# Altium PCB LightLinkV2.PcbDoc
Units mil, origin at the board's own origin, x right, y up, seen from the top; angles counter-clockwise.
Board outline 15795 x 10265 mil, 2 copper layers (Top Layer, Bottom Layer); 257 components, 206 nets, 785 pads, 0 vias.
Unrouted connection lines stored in the file: 530.
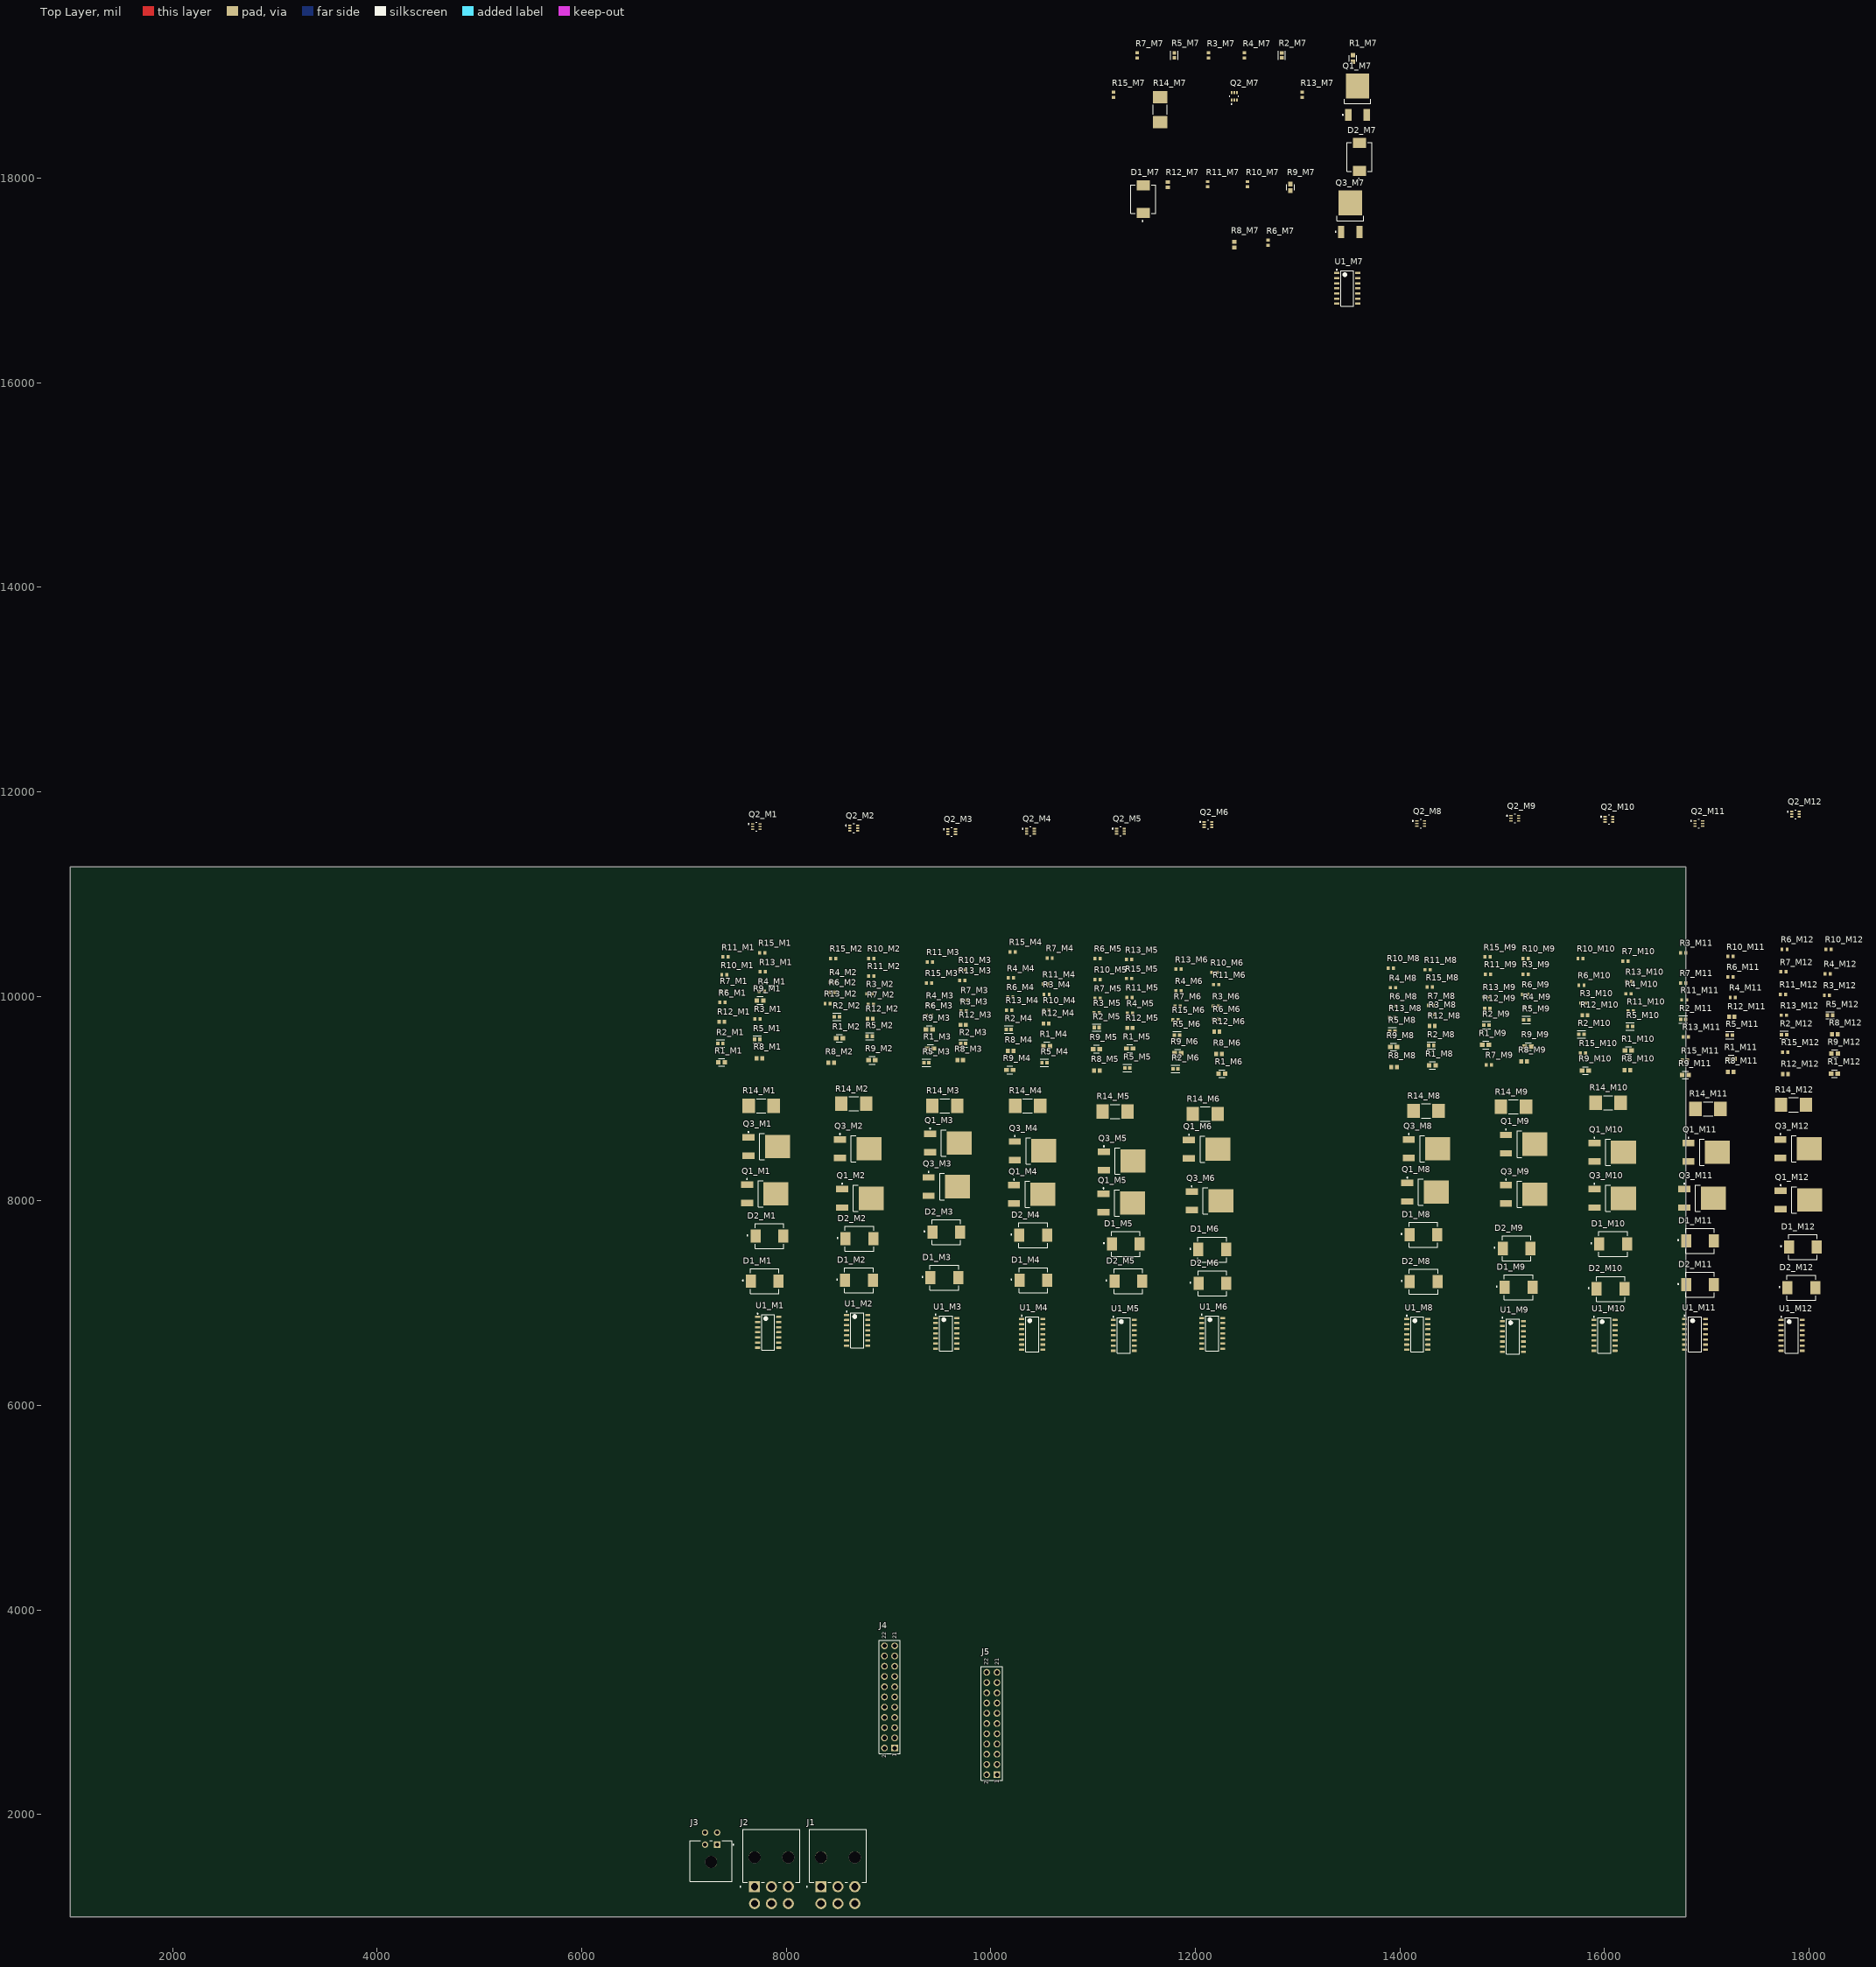
[diagram p0: Top Layer view]
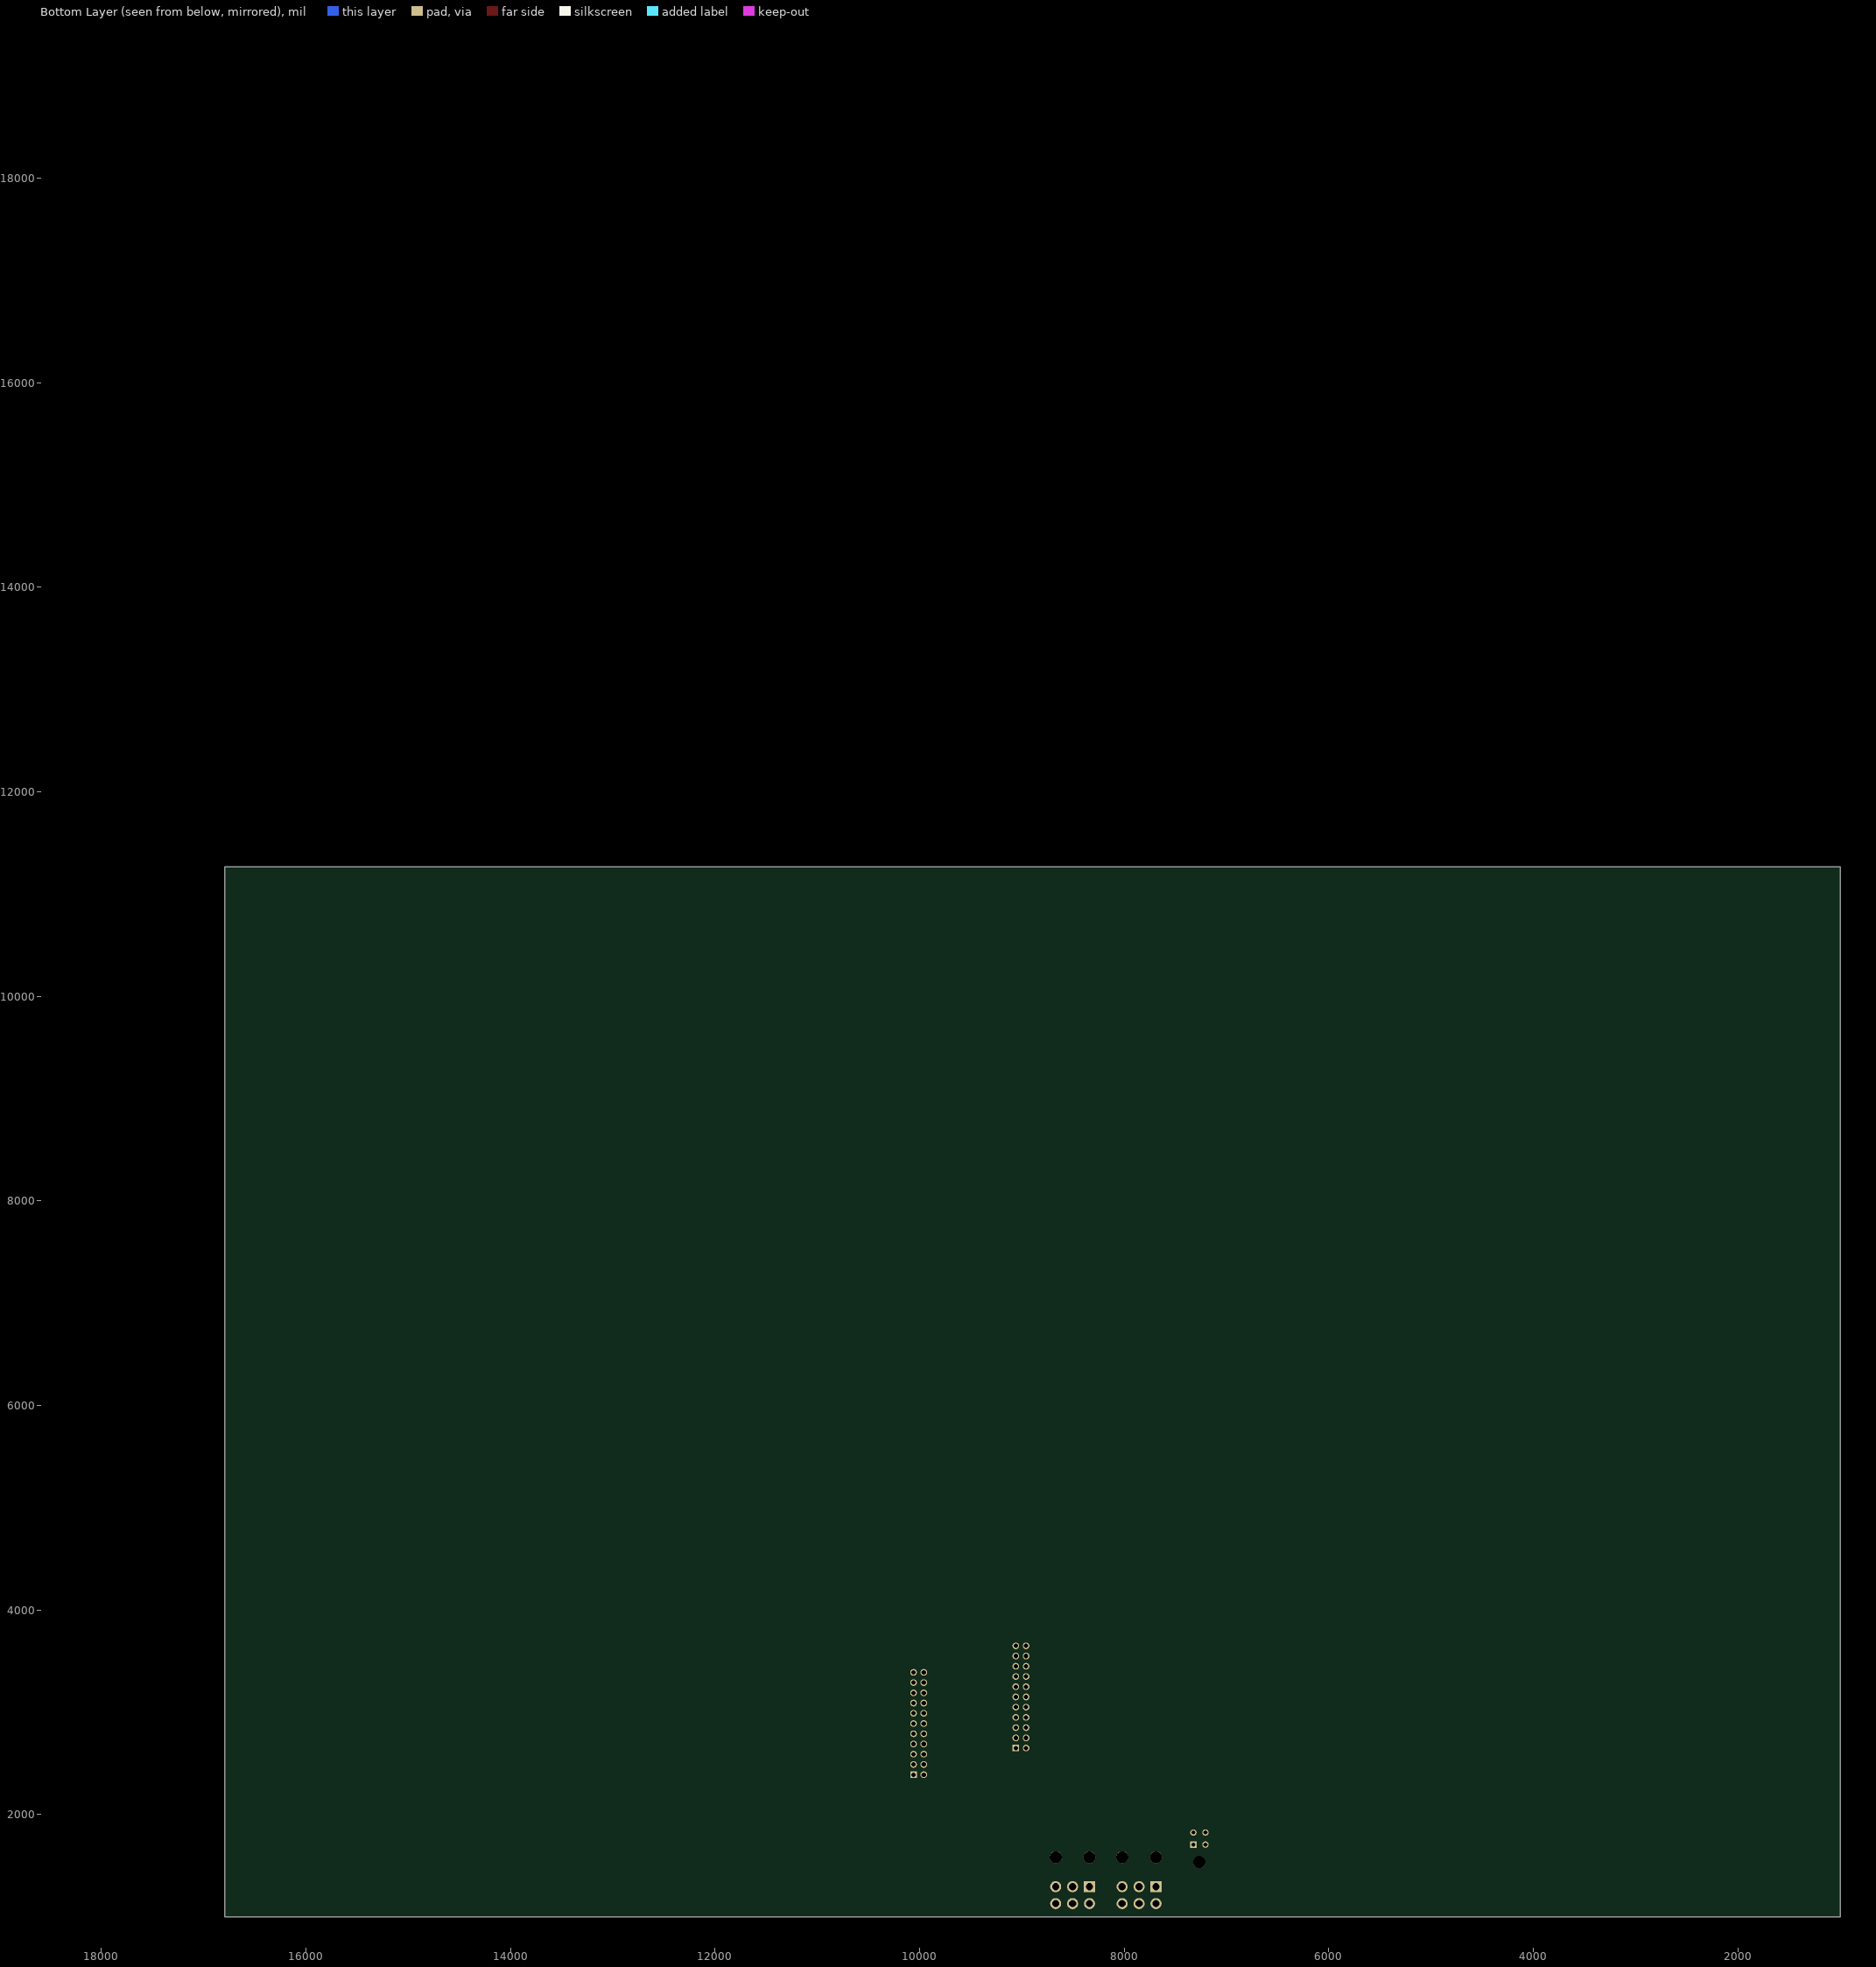
[diagram p1: Bottom Layer view, seen from below]

## Layer stack, top to bottom
Top Solder: solder mask 0.4, Solder Resist, Dk 3.5
Top Layer: signal copper 1.4
Dielectric 1: dielectric 12.6, FR-4, Dk 4.8
Bottom Layer: signal copper 1.4
Bottom Solder: solder mask 0.4, Solder Resist, Dk 3.5

## Board outline
1000,1000 16795,1000 16795,11265 1000,11265

## Design rules (kind name [scope] priority, off if disabled: settings)
Clearance [All] p1: gap=10 ignorepadtopadclearanceinfootprint=FALSE except(0: Arc-Hole Track-Hole SMDPad-Hole THPad-Hole Via-Hole Fill-Hole Poly-Hole Region-Hole Text-Hole)
PolygonConnect [All] p1: connectstyle=Relief reliefconductorwidth=10 reliefentries=4 polygonreliefangle="90 Angle" airgapwidth=10
RoutingVias [All] p1: holewidth=28 width=50 viastyle="Through Hole" minholewidth=28 minwidth=50 maxholewidth=28 maxwidth=50
SolderMaskExpansion [All] p1: expansion=4 istentingtop=FALSE
Width [All] p1: maxlimit=10 minlimit=10 preferedwidth=10
30 further rules are at their usual default settings.

## Classes and differential pairs
channel class MOSFET: M1 M2 M3 M4 M5 M6 M7 M8 M9 M10 M11 M12
component class M12: D1_M12 D2_M12 Q1_M12 Q2_M12 Q3_M12 R1_M12 R2_M12 R3_M12 R4_M12 R5_M12 R6_M12 R7_M12 R8_M12 R9_M12 R10_M12 R11_M12 R12_M12 R13_M12 R14_M12 R15_M12 U1_M12
component class M11: D1_M11 D2_M11 Q1_M11 Q2_M11 Q3_M11 R1_M11 R2_M11 R3_M11 R4_M11 R5_M11 R6_M11 R7_M11 R8_M11 R9_M11 R10_M11 R11_M11 R12_M11 R13_M11 R14_M11 R15_M11 U1_M11
component class M10: D1_M10 D2_M10 Q1_M10 Q2_M10 Q3_M10 R1_M10 R2_M10 R3_M10 R4_M10 R5_M10 R6_M10 R7_M10 R8_M10 R9_M10 R10_M10 R11_M10 R12_M10 R13_M10 R14_M10 R15_M10 U1_M10
component class M9: D1_M9 D2_M9 Q1_M9 Q2_M9 Q3_M9 R1_M9 R2_M9 R3_M9 R4_M9 R5_M9 R6_M9 R7_M9 R8_M9 R9_M9 R10_M9 R11_M9 R12_M9 R13_M9 R14_M9 R15_M9 U1_M9
component class M8: D1_M8 D2_M8 Q1_M8 Q2_M8 Q3_M8 R1_M8 R2_M8 R3_M8 R4_M8 R5_M8 R6_M8 R7_M8 R8_M8 R9_M8 R10_M8 R11_M8 R12_M8 R13_M8 R14_M8 R15_M8 U1_M8
component class M7: D1_M7 D2_M7 Q1_M7 Q2_M7 Q3_M7 R1_M7 R2_M7 R3_M7 R4_M7 R5_M7 R6_M7 R7_M7 R8_M7 R9_M7 R10_M7 R11_M7 R12_M7 R13_M7 R14_M7 R15_M7 U1_M7
component class M6: D1_M6 D2_M6 Q1_M6 Q2_M6 Q3_M6 R1_M6 R2_M6 R3_M6 R4_M6 R5_M6 R6_M6 R7_M6 R8_M6 R9_M6 R10_M6 R11_M6 R12_M6 R13_M6 R14_M6 R15_M6 U1_M6
component class M5: D1_M5 D2_M5 Q1_M5 Q2_M5 Q3_M5 R1_M5 R2_M5 R3_M5 R4_M5 R5_M5 R6_M5 R7_M5 R8_M5 R9_M5 R10_M5 R11_M5 R12_M5 R13_M5 R14_M5 R15_M5 U1_M5
component class M4: D1_M4 D2_M4 Q1_M4 Q2_M4 Q3_M4 R1_M4 R2_M4 R3_M4 R4_M4 R5_M4 R6_M4 R7_M4 R8_M4 R9_M4 R10_M4 R11_M4 R12_M4 R13_M4 R14_M4 R15_M4 U1_M4
component class M3: D1_M3 D2_M3 Q1_M3 Q2_M3 Q3_M3 R1_M3 R2_M3 R3_M3 R4_M3 R5_M3 R6_M3 R7_M3 R8_M3 R9_M3 R10_M3 R11_M3 R12_M3 R13_M3 R14_M3 R15_M3 U1_M3
component class M2: D1_M2 D2_M2 Q1_M2 Q2_M2 Q3_M2 R1_M2 R2_M2 R3_M2 R4_M2 R5_M2 R6_M2 R7_M2 R8_M2 R9_M2 R10_M2 R11_M2 R12_M2 R13_M2 R14_M2 R15_M2 U1_M2
component class M1: D1_M1 D2_M1 Q1_M1 Q2_M1 Q3_M1 R1_M1 R2_M1 R3_M1 R4_M1 R5_M1 R6_M1 R7_M1 R8_M1 R9_M1 R10_M1 R11_M1 R12_M1 R13_M1 R14_M1 R15_M1 U1_M1
component class LightLinkV2: J1 J2 J3 J4 J5

## Components (designator, comment, footprint, x,y, rotation, side; value= is the part's Value field where it differs from the comment)
D1_M1 "S5BC-13-F" FP-SMC-MFG 7790,7215 r0 top value=40pF (schematic designator D1)
D1_M2 "S5BC-13-F" FP-SMC-MFG 8710.83,7225 r0 top value=40pF (schematic designator D1)
D1_M3 "S5BC-13-F" FP-SMC-MFG 9545,7250 r0 top value=40pF (schematic designator D1)
D1_M4 "S5BC-13-F" FP-SMC-MFG 10415.83,7225 r0 top value=40pF (schematic designator D1)
D1_M5 "S5BC-13-F" FP-SMC-MFG 11320,7580 r0 top value=40pF (schematic designator D1)
D1_M6 "S5BC-13-F" FP-SMC-MFG 12165,7525 r0 top value=40pF (schematic designator D1)
D1_M7 "S5BC-13-F" FP-SMC-MFG 11490,17795 r90 top value=40pF (schematic designator D1)
D1_M8 "S5BC-13-F" FP-SMC-MFG 14230,7670 r0 top value=40pF (schematic designator D1)
D1_M9 "S5BC-13-F" FP-SMC-MFG 15160,7155 r0 top value=40pF (schematic designator D1)
D1_M10 "S5BC-13-F" FP-SMC-MFG 16085,7580 r0 top value=40pF (schematic designator D1)
D1_M11 "S5BC-13-F" FP-SMC-MFG 16935,7610 r0 top value=40pF (schematic designator D1)
D1_M12 "S5BC-13-F" FP-SMC-MFG 17940.83,7550 r0 top value=40pF (schematic designator D1)
D2_M1 "S5BC-13-F" FP-SMC-MFG 7835.83,7655 r0 top value=40pF (schematic designator D2)
D2_M2 "S5BC-13-F" FP-SMC-MFG 8715,7630 r0 top value=40pF (schematic designator D2)
D2_M3 "S5BC-13-F" FP-SMC-MFG 9565,7695 r0 top value=40pF (schematic designator D2)
D2_M4 "S5BC-13-F" FP-SMC-MFG 10415,7665 r0 top value=40pF (schematic designator D2)
D2_M5 "S5BC-13-F" FP-SMC-MFG 11345,7215 r0 top value=40pF (schematic designator D2)
D2_M6 "S5BC-13-F" FP-SMC-MFG 12165.83,7195 r0 top value=40pF (schematic designator D2)
D2_M7 "S5BC-13-F" FP-SMC-MFG 13605,18207.17 r90 top value=40pF (schematic designator D2)
D2_M8 "S5BC-13-F" FP-SMC-MFG 14230.83,7210 r0 top value=40pF (schematic designator D2)
D2_M9 "S5BC-13-F" FP-SMC-MFG 15140,7535 r0 top value=40pF (schematic designator D2)
D2_M10 "S5BC-13-F" FP-SMC-MFG 16060,7140 r0 top value=40pF (schematic designator D2)
D2_M11 "S5BC-13-F" FP-SMC-MFG 16935,7180 r0 top value=40pF (schematic designator D2)
D2_M12 "S5BC-13-F" FP-SMC-MFG 17925,7150 r0 top value=40pF (schematic designator D2)
J1 "455580003" FP-455580003-MFG 8505,1590 r0 top
J2 "455580003" FP-455580003-MFG 7855,1590 r0 top
J3 "43045-0400" FP-43045-0400-MFG 7265,1550 r0 top
J4 "61302221121" 61302221121 9010,3150 r90 top
J5 "61302221121" 61302221121 10010,2890 r90 top
Q1_M1 "NTD25P03LT4G" ONSC-DPAK-3-369C-01_V 7789.76,8070 r0 top (schematic designator Q1)
Q1_M2 "NTD25P03LT4G" ONSC-DPAK-3-369C-01_V 8720,8025 r0 top (schematic designator Q1)
Q1_M3 "NTD25P03LT4G" ONSC-DPAK-3-369C-01_V 9580,8565 r0 top (schematic designator Q1)
Q1_M4 "NTD25P03LT4G" ONSC-DPAK-3-369C-01_V 10400,8065 r0 top (schematic designator Q1)
Q1_M5 "NTD25P03LT4G" ONSC-DPAK-3-369C-01_V 11275,7980 r0 top (schematic designator Q1)
Q1_M6 "NTD25P03LT4G" ONSC-DPAK-3-369C-01_V 12110,8505 r0 top (schematic designator Q1)
Q1_M7 "NTD25P03LT4G" ONSC-DPAK-3-369C-01_V 13585,18792.17 r90 top (schematic designator Q1)
Q1_M8 "NTD25P03LT4G" ONSC-DPAK-3-369C-01_V 14245,8085 r0 top (schematic designator Q1)
Q1_M9 "NTD25P03LT4G" ONSC-DPAK-3-369C-01_V 15210,8555 r0 top (schematic designator Q1)
Q1_M10 "NTD25P03LT4G" ONSC-DPAK-3-369C-01_V 16075,8475 r0 top (schematic designator Q1)
Q1_M11 "NTD25P03LT4G" ONSC-DPAK-3-369C-01_V 16993.23,8475.16 r0 top (schematic designator Q1)
Q1_M12 "NTD25P03LT4G" ONSC-DPAK-3-369C-01_V 17895,8010 r0 top (schematic designator Q1)
Q2_M1 "SSM6N7002KFU,LF" FP-SSOP6-P-0_65A-MFG 7707.4,11659.41 r0 top (schematic designator Q2)
Q2_M2 "SSM6N7002KFU,LF" FP-SSOP6-P-0_65A-MFG 8660,11645 r0 top (schematic designator Q2)
Q2_M3 "SSM6N7002KFU,LF" FP-SSOP6-P-0_65A-MFG 9617.4,11609.41 r0 top (schematic designator Q2)
Q2_M4 "SSM6N7002KFU,LF" FP-SSOP6-P-0_65A-MFG 10387.4,11614.41 r0 top (schematic designator Q2)
Q2_M5 "SSM6N7002KFU,LF" FP-SSOP6-P-0_65A-MFG 11267.4,11614.41 r0 top (schematic designator Q2)
Q2_M6 "SSM6N7002KFU,LF" FP-SSOP6-P-0_65A-MFG 12122.6,11680 r0 top (schematic designator Q2)
Q2_M7 "SSM6N7002KFU,LF" FP-SSOP6-P-0_65A-MFG 12380,18800 r90 top (schematic designator Q2)
Q2_M8 "SSM6N7002KFU,LF" FP-SSOP6-P-0_65A-MFG 14202.4,11689.41 r0 top (schematic designator Q2)
Q2_M9 "SSM6N7002KFU,LF" FP-SSOP6-P-0_65A-MFG 15122.6,11740.59 r0 top (schematic designator Q2)
Q2_M10 "SSM6N7002KFU,LF" FP-SSOP6-P-0_65A-MFG 16042.6,11730.59 r0 top (schematic designator Q2)
Q2_M11 "SSM6N7002KFU,LF" FP-SSOP6-P-0_65A-MFG 16922.6,11689.41 r0 top (schematic designator Q2)
Q2_M12 "SSM6N7002KFU,LF" FP-SSOP6-P-0_65A-MFG 17867.4,11780.59 r0 top (schematic designator Q2)
Q3_M1 "NTD25P03LT4G" ONSC-DPAK-3-369C-01_V 7803.23,8530.16 r0 top (schematic designator Q3)
Q3_M2 "NTD25P03LT4G" ONSC-DPAK-3-369C-01_V 8698.23,8510.16 r0 top (schematic designator Q3)
Q3_M3 "NTD25P03LT4G" ONSC-DPAK-3-369C-01_V 9565,8140 r0 top (schematic designator Q3)
Q3_M4 "NTD25P03LT4G" ONSC-DPAK-3-369C-01_V 10408.23,8490.16 r0 top (schematic designator Q3)
Q3_M5 "NTD25P03LT4G" ONSC-DPAK-3-369C-01_V 11278.23,8390.16 r0 top (schematic designator Q3)
Q3_M6 "NTD25P03LT4G" ONSC-DPAK-3-369C-01_V 12138.23,8000.16 r0 top (schematic designator Q3)
Q3_M7 "NTD25P03LT4G" ONSC-DPAK-3-369C-01_V 13515,17647.17 r90 top (schematic designator Q3)
Q3_M8 "NTD25P03LT4G" ONSC-DPAK-3-369C-01_V 14260,8510 r0 top (schematic designator Q3)
Q3_M9 "NTD25P03LT4G" ONSC-DPAK-3-369C-01_V 15210,8065 r0 top (schematic designator Q3)
Q3_M10 "NTD25P03LT4G" ONSC-DPAK-3-369C-01_V 16075,8025 r0 top (schematic designator Q3)
Q3_M11 "NTD25P03LT4G" ONSC-DPAK-3-369C-01_V 16953.23,8025.16 r0 top (schematic designator Q3)
Q3_M12 "NTD25P03LT4G" ONSC-DPAK-3-369C-01_V 17893.23,8510.16 r0 top (schematic designator Q3)
R1_M1 "CRCW060343K0FKEA" FP-CRCW0603-e3-IPC_A 7367.9,9355 r0 top (schematic designator R1)
R1_M2 "CRCW060343K0FKEA" FP-CRCW0603-e3-IPC_A 8520,9590 r0 top (schematic designator R1)
R1_M3 "CRCW060343K0FKEA" FP-CRCW0603-e3-IPC_A 9410,9490 r0 top (schematic designator R1)
R1_M4 "CRCW060343K0FKEA" FP-CRCW0603-e3-IPC_A 10547.9,9515 r0 top (schematic designator R1)
R1_M5 "CRCW060343K0FKEA" FP-CRCW0603-e3-IPC_A 11357.9,9490 r0 top (schematic designator R1)
R1_M6 "CRCW060343K0FKEA" FP-CRCW0603-e3-IPC_A 12260,9245 r0 top (schematic designator R1)
R1_M7 "CRCW060343K0FKEA" FP-CRCW0603-e3-IPC_A 13540,19170 r90 top (schematic designator R1)
R1_M8 "CRCW060343K0FKEA" FP-CRCW0603-e3-IPC_A 14317.9,9325 r0 top (schematic designator R1)
R1_M9 "CRCW060343K0FKEA" FP-CRCW0603-e3-IPC_A 14837.9,9525 r0 top (schematic designator R1)
R1_M10 "CRCW060343K0FKEA" FP-CRCW0603-e3-IPC_A 16232.9,9470 r0 top (schematic designator R1)
R1_M11 "CRCW060343K0FKEA" FP-CRCW0603-e3-IPC_A 17237.9,9390 r0 top (schematic designator R1)
R1_M12 "CRCW060343K0FKEA" FP-CRCW0603-e3-IPC_A 18247.9,9245 r0 top (schematic designator R1)
R2_M1 "ERA-3AEB102V" FP-ERA3A-IPC_C 7355.37,9540 r0 top (schematic designator R2)
R2_M2 "ERA-3AEB102V" FP-ERA3A-IPC_C 8495.37,9800 r0 top (schematic designator R2)
R2_M3 "ERA-3AEB102V" FP-ERA3A-IPC_C 9730,9540 r0 top (schematic designator R2)
R2_M4 "ERA-3AEB102V" FP-ERA3A-IPC_C 10175.37,9675 r0 top (schematic designator R2)
R2_M5 "ERA-3AEB102V" FP-ERA3A-IPC_C 11035.37,9695 r0 top (schematic designator R2)
R2_M6 "ERA-3AEB102V" FP-ERA3A-IPC_C 11805.37,9290 r0 top (schematic designator R2)
R2_M7 "ERA-3AEB102V" FP-ERA3A-IPC_C 12845,19200 r90 top (schematic designator R2)
R2_M8 "ERA-3AEB102V" FP-ERA3A-IPC_C 14305.37,9520 r0 top (schematic designator R2)
R2_M9 "ERA-3AEB102V" FP-ERA3A-IPC_C 14845.37,9720 r0 top (schematic designator R2)
R2_M10 "ERA-3AEB102V" FP-ERA3A-IPC_C 15775,9630 r0 top (schematic designator R2)
R2_M11 "ERA-3AEB102V" FP-ERA3A-IPC_C 16769.63,9775 r0 top (schematic designator R2)
R2_M12 "ERA-3AEB102V" FP-ERA3A-IPC_C 17755.37,9625 r0 top (schematic designator R2)
R3_M1 "ERJ3EKF1002V" RESC1609X55X30LL15T15 7720,9780 r0 top (schematic designator R3)
R3_M2 "ERJ3EKF1002V" RESC1609X55X30LL15T15 8815,10025 r0 top (schematic designator R3)
R3_M3 "ERJ3EKF1002V" RESC1609X55X30LL15T15 9735,9855 r0 top (schematic designator R3)
R3_M4 "ERJ3EKF1002V" RESC1609X55X30LL15T15 10545,10020 r0 top (schematic designator R3)
R3_M5 "ERJ3EKF1002V" RESC1609X55X30LL15T15 11035,9840 r0 top (schematic designator R3)
R3_M6 "ERJ3EKF1002V" RESC1609X55X30LL15T15 12200,9905 r0 top (schematic designator R3)
R3_M7 "ERJ3EKF1002V" RESC1609X55X30LL15T15 12130,19200 r90 top (schematic designator R3)
R3_M8 "ERJ3EKF1002V" RESC1609X55X30LL15T15 14315,9825 r0 top (schematic designator R3)
R3_M9 "ERJ3EKF1002V" RESC1609X55X30LL15T15 15230,10215 r0 top (schematic designator R3)
R3_M10 "ERJ3EKF1002V" RESC1609X55X30LL15T15 15795,9935 r0 top (schematic designator R3)
R3_M11 "ERJ3EKF1002V" RESC1609X55X30LL15T15 16770.59,10425 r0 top (schematic designator R3)
R3_M12 "ERJ3EKF1002V" RESC1609X55X30LL15T15 18175,10010 r0 top (schematic designator R3)
R4_M1 "ERJ3EKF1002V" RESC1609X55X30LL15T15 7760,10050 r0 top (schematic designator R4)
R4_M2 "ERJ3EKF1002V" RESC1609X55X30LL15T15 8454.41,10140 r0 top (schematic designator R4)
R4_M3 "ERJ3EKF1002V" RESC1609X55X30LL15T15 9400,9915 r0 top (schematic designator R4)
R4_M4 "ERJ3EKF1002V" RESC1609X55X30LL15T15 10195,10180 r0 top (schematic designator R4)
R4_M5 "ERJ3EKF1002V" RESC1609X55X30LL15T15 11360,9835 r0 top (schematic designator R4)
R4_M6 "ERJ3EKF1002V" RESC1609X55X30LL15T15 11835,10055 r0 top (schematic designator R4)
R4_M7 "ERJ3EKF1002V" RESC1609X55X30LL15T15 12480,19200 r90 top (schematic designator R4)
R4_M8 "ERJ3EKF1002V" RESC1609X55X30LL15T15 13930.59,10085 r0 top (schematic designator R4)
R4_M9 "ERJ3EKF1002V" RESC1609X55X30LL15T15 15240,9900 r0 top (schematic designator R4)
R4_M10 "ERJ3EKF1002V" RESC1609X55X30LL15T15 16235,10025 r0 top (schematic designator R4)
R4_M11 "ERJ3EKF1002V" RESC1609X55X30LL15T15 17255,9990 r0 top (schematic designator R4)
R4_M12 "ERJ3EKF1002V" RESC1609X55X30LL15T15 18180.59,10220 r0 top (schematic designator R4)
R5_M1 "ERA-3AEB102V" FP-ERA3A-IPC_C 7715.37,9580 r0 top (schematic designator R5)
R5_M2 "ERA-3AEB102V" FP-ERA3A-IPC_C 8815.37,9610 r0 top (schematic designator R5)
R5_M3 "ERA-3AEB102V" FP-ERA3A-IPC_C 9370,9350 r0 top (schematic designator R5)
R5_M4 "ERA-3AEB102V" FP-ERA3A-IPC_C 10524.63,9350 r0 top (schematic designator R5)
R5_M5 "ERA-3AEB102V" FP-ERA3A-IPC_C 11335,9300 r0 top (schematic designator R5)
R5_M6 "ERA-3AEB102V" FP-ERA3A-IPC_C 11819.63,9620 r0 top (schematic designator R5)
R5_M7 "ERA-3AEB102V" FP-ERA3A-IPC_C 11795,19200 r90 top (schematic designator R5)
R5_M8 "ERA-3AEB102V" FP-ERA3A-IPC_C 13925.37,9660 r0 top (schematic designator R5)
R5_M9 "ERA-3AEB102V" FP-ERA3A-IPC_C 15234.63,9770 r0 top (schematic designator R5)
R5_M10 "ERA-3AEB102V" FP-ERA3A-IPC_C 16250.37,9705 r0 top (schematic designator R5)
R5_M11 "ERA-3AEB102V" FP-ERA3A-IPC_C 17225.37,9620 r0 top (schematic designator R5)
R5_M12 "ERA-3AEB102V" FP-ERA3A-IPC_C 18205.37,9815 r0 top (schematic designator R5)
R6_M1 "ERJ3EKF1002V" RESC1609X55X30LL15T15 7375,9940 r0 top (schematic designator R6)
R6_M2 "ERJ3EKF1002V" RESC1609X55X30LL15T15 8450,10040 r0 top (schematic designator R6)
R6_M3 "ERJ3EKF1002V" RESC1609X55X30LL15T15 9395,9815 r0 top (schematic designator R6)
R6_M4 "ERJ3EKF1002V" RESC1609X55X30LL15T15 10190,9995 r0 top (schematic designator R6)
R6_M5 "ERJ3EKF1002V" RESC1609X55X30LL15T15 11045,10370 r0 top (schematic designator R6)
R6_M6 "ERJ3EKF1002V" RESC1609X55X30LL15T15 12205,9780 r0 top (schematic designator R6)
R6_M7 "ERJ3EKF1002V" RESC1609X55X30LL15T15 12710,17370 r90 top (schematic designator R6)
R6_M8 "ERJ3EKF1002V" RESC1609X55X30LL15T15 13935,9905 r0 top (schematic designator R6)
R6_M9 "ERJ3EKF1002V" RESC1609X55X30LL15T15 15225,10020 r0 top (schematic designator R6)
R6_M10 "ERJ3EKF1002V" RESC1609X55X30LL15T15 15774.41,10110 r0 top (schematic designator R6)
R6_M11 "ERJ3EKF1002V" RESC1609X55X30LL15T15 17230,10190 r0 top (schematic designator R6)
R6_M12 "ERJ3EKF1002V" RESC1609X55X30LL15T15 17760,10460 r0 top (schematic designator R6)
R7_M1 "ERJ3EKF1002V" RESC1609X55X30LL15T15 7385,10055 r0 top (schematic designator R7)
R7_M2 "ERJ3EKF1002V" RESC1609X55X30LL15T15 8825,9920 r0 top (schematic designator R7)
R7_M3 "ERJ3EKF1002V" RESC1609X55X30LL15T15 9740,9965 r0 top (schematic designator R7)
R7_M4 "ERJ3EKF1002V" RESC1609X55X30LL15T15 10575,10375 r0 top (schematic designator R7)
R7_M5 "ERJ3EKF1002V" RESC1609X55X30LL15T15 11045,9980 r0 top (schematic designator R7)
R7_M6 "ERJ3EKF1002V" RESC1609X55X30LL15T15 11825,9905 r0 top (schematic designator R7)
R7_M7 "ERJ3EKF1002V" RESC1609X55X30LL15T15 11430,19200 r90 top (schematic designator R7)
R7_M8 "ERJ3EKF1002V" RESC1609X55X30LL15T15 14305,9910 r0 top (schematic designator R7)
R7_M9 "ERJ3EKF1002V" RESC1609X55X30LL15T15 14869.41,9330 r0 top (schematic designator R7)
R7_M10 "ERJ3EKF1002V" RESC1609X55X30LL15T15 16205.59,10345 r0 top (schematic designator R7)
R7_M11 "ERJ3EKF1002V" RESC1609X55X30LL15T15 16770,10130 r0 top (schematic designator R7)
R7_M12 "ERJ3EKF1002V" RESC1609X55X30LL15T15 17750,10240 r0 top (schematic designator R7)
R8_M1 "ERA-3AEB751V" RESC1608X55X30ML20T20 7737.44,9395 r0 top (schematic designator R8)
R8_M2 "ERA-3AEB751V" RESC1608X55X30ML20T20 8440,9350 r0 top (schematic designator R8)
R8_M3 "ERA-3AEB751V" RESC1608X55X30ML20T20 9700,9375 r0 top (schematic designator R8)
R8_M4 "ERA-3AEB751V" RESC1608X55X30ML20T20 10195,9465 r0 top (schematic designator R8)
R8_M5 "ERA-3AEB751V" RESC1608X55X30ML20T20 11037.44,9275 r0 top (schematic designator R8)
R8_M6 "ERA-3AEB751V" RESC1608X55X30ML20T20 12232.44,9435 r0 top (schematic designator R8)
R8_M7 "ERA-3AEB751V" RESC1608X55X30ML20T20 12380,17350 r90 top (schematic designator R8)
R8_M8 "ERA-3AEB751V" RESC1608X55X30ML20T20 13942.44,9310 r0 top (schematic designator R8)
R8_M9 "ERA-3AEB751V" RESC1608X55X30ML20T20 15212.44,9365 r0 top (schematic designator R8)
R8_M10 "ERA-3AEB751V" RESC1608X55X30ML20T20 16225,9280 r0 top (schematic designator R8)
R8_M11 "ERA-3AEB751V" RESC1608X55X30ML20T20 17232.44,9260 r0 top (schematic designator R8)
R8_M12 "ERA-3AEB751V" RESC1608X55X30ML20T20 18252.44,9630 r0 top (schematic designator R8)
R9_M1 "CRCW060343K0FKEA" FP-CRCW0603-e3-IPC_A 7745,9960 r0 top (schematic designator R9)
R9_M2 "CRCW060343K0FKEA" FP-CRCW0603-e3-IPC_A 8837.9,9375 r0 top (schematic designator R9)
R9_M3 "CRCW060343K0FKEA" FP-CRCW0603-e3-IPC_A 9397.9,9675 r0 top (schematic designator R9)
R9_M4 "CRCW060343K0FKEA" FP-CRCW0603-e3-IPC_A 10185,9280 r0 top (schematic designator R9)
R9_M5 "CRCW060343K0FKEA" FP-CRCW0603-e3-IPC_A 11032.9,9485 r0 top (schematic designator R9)
R9_M6 "CRCW060343K0FKEA" FP-CRCW0603-e3-IPC_A 11827.9,9445 r0 top (schematic designator R9)
R9_M7 "CRCW060343K0FKEA" FP-CRCW0603-e3-IPC_A 12930,17910 r90 top (schematic designator R9)
R9_M8 "CRCW060343K0FKEA" FP-CRCW0603-e3-IPC_A 13937.9,9505 r0 top (schematic designator R9)
R9_M9 "CRCW060343K0FKEA" FP-CRCW0603-e3-IPC_A 15252.9,9510 r0 top (schematic designator R9)
R9_M10 "CRCW060343K0FKEA" FP-CRCW0603-e3-IPC_A 15812.9,9275 r0 top (schematic designator R9)
R9_M11 "CRCW060343K0FKEA" FP-CRCW0603-e3-IPC_A 16790,9230 r0 top (schematic designator R9)
R9_M12 "CRCW060343K0FKEA" FP-CRCW0603-e3-IPC_A 18250,9440 r0 top (schematic designator R9)
R10_M1 "ERJ3EKF1002V" RESC1609X55X30LL15T15 7395,10210 r0 top (schematic designator R10)
R10_M2 "ERJ3EKF1002V" RESC1609X55X30LL15T15 8830,10370 r0 top (schematic designator R10)
R10_M3 "ERJ3EKF1002V" RESC1609X55X30LL15T15 9719.41,10260 r0 top (schematic designator R10)
R10_M4 "ERJ3EKF1002V" RESC1609X55X30LL15T15 10544.41,9865 r0 top (schematic designator R10)
R10_M5 "ERJ3EKF1002V" RESC1609X55X30LL15T15 11045,10165 r0 top (schematic designator R10)
R10_M6 "ERJ3EKF1002V" RESC1609X55X30LL15T15 12185,10235 r0 top (schematic designator R10)
R10_M7 "ERJ3EKF1002V" RESC1609X55X30LL15T15 12510,17940 r90 top (schematic designator R10)
R10_M8 "ERJ3EKF1002V" RESC1609X55X30LL15T15 13910,10275 r0 top (schematic designator R10)
R10_M9 "ERJ3EKF1002V" RESC1609X55X30LL15T15 15230.59,10370 r0 top (schematic designator R10)
R10_M10 "ERJ3EKF1002V" RESC1609X55X30LL15T15 15765.59,10370 r0 top (schematic designator R10)
R10_M11 "ERJ3EKF1002V" RESC1609X55X30LL15T15 17230,10390 r0 top (schematic designator R10)
R10_M12 "ERJ3EKF1002V" RESC1609X55X30LL15T15 18190.59,10460 r0 top (schematic designator R10)
R11_M1 "ERJ3EKF1002V" RESC1609X55X30LL15T15 7405,10385 r0 top (schematic designator R11)
R11_M2 "ERJ3EKF1002V" RESC1609X55X30LL15T15 8830,10200 r0 top (schematic designator R11)
R11_M3 "ERJ3EKF1002V" RESC1609X55X30LL15T15 9405,10335 r0 top (schematic designator R11)
R11_M4 "ERJ3EKF1002V" RESC1609X55X30LL15T15 10540,10120 r0 top (schematic designator R11)
R11_M5 "ERJ3EKF1002V" RESC1609X55X30LL15T15 11355,9990 r0 top (schematic designator R11)
R11_M6 "ERJ3EKF1002V" RESC1609X55X30LL15T15 12205,10115 r0 top (schematic designator R11)
R11_M7 "ERJ3EKF1002V" RESC1609X55X30LL15T15 12120,17940 r90 top (schematic designator R11)
R11_M8 "ERJ3EKF1002V" RESC1609X55X30LL15T15 14270,10260 r0 top (schematic designator R11)
R11_M9 "ERJ3EKF1002V" RESC1609X55X30LL15T15 14860,10215 r0 top (schematic designator R11)
R11_M10 "ERJ3EKF1002V" RESC1609X55X30LL15T15 16255,9855 r0 top (schematic designator R11)
R11_M11 "ERJ3EKF1002V" RESC1609X55X30LL15T15 16780,9965 r0 top (schematic designator R11)
R11_M12 "ERJ3EKF1002V" RESC1609X55X30LL15T15 17745,10020 r0 top (schematic designator R11)
R12_M1 "ERA3AEB242V" RESC1608X55X30NL20T20 7370,9750 r0 top (schematic designator R12)
R12_M2 "ERA3AEB242V" RESC1608X55X30NL20T20 8819.41,9780 r0 top (schematic designator R12)
R12_M3 "ERA3AEB242V" RESC1608X55X30NL20T20 9730,9720 r0 top (schematic designator R12)
R12_M4 "ERA3AEB242V" RESC1608X55X30NL20T20 10540,9735 r0 top (schematic designator R12)
R12_M5 "ERA3AEB242V" RESC1608X55X30NL20T20 11360,9690 r0 top (schematic designator R12)
R12_M6 "ERA3AEB242V" RESC1608X55X30NL20T20 12210,9655 r0 top (schematic designator R12)
R12_M7 "ERA3AEB242V" RESC1608X55X30NL20T20 11730,17935 r90 top (schematic designator R12)
R12_M8 "ERA3AEB242V" RESC1608X55X30NL20T20 14315,9710 r0 top (schematic designator R12)
R12_M9 "ERA3AEB242V" RESC1608X55X30NL20T20 14854.41,9880 r0 top (schematic designator R12)
R12_M10 "ERA3AEB242V" RESC1608X55X30NL20T20 15809.41,9815 r0 top (schematic designator R12)
R12_M11 "ERA3AEB242V" RESC1608X55X30NL20T20 17244.41,9800 r0 top (schematic designator R12)
R12_M12 "ERA3AEB242V" RESC1608X55X30NL20T20 17769.41,9240 r0 top (schematic designator R12)
R13_M1 "ERJ3EKF1002V" RESC1609X55X30LL15T15 7770,10240 r0 top (schematic designator R13)
R13_M2 "ERJ3EKF1002V" RESC1609X55X30LL15T15 8405,9930 r0 top (schematic designator R13)
R13_M3 "ERJ3EKF1002V" RESC1609X55X30LL15T15 9720,10155 r0 top (schematic designator R13)
R13_M4 "ERJ3EKF1002V" RESC1609X55X30LL15T15 10180,9865 r0 top (schematic designator R13)
R13_M5 "ERJ3EKF1002V" RESC1609X55X30LL15T15 11350,10360 r0 top (schematic designator R13)
R13_M6 "ERJ3EKF1002V" RESC1609X55X30LL15T15 11835,10265 r0 top (schematic designator R13)
R13_M7 "ERJ3EKF1002V" RESC1609X55X30LL15T15 13045,18815 r90 top (schematic designator R13)
R13_M8 "ERJ3EKF1002V" RESC1609X55X30LL15T15 13925,9790 r0 top (schematic designator R13)
R13_M9 "ERJ3EKF1002V" RESC1609X55X30LL15T15 14845,9995 r0 top (schematic designator R13)
R13_M10 "ERJ3EKF1002V" RESC1609X55X30LL15T15 16240.59,10145 r0 top (schematic designator R13)
R13_M11 "ERJ3EKF1002V" RESC1609X55X30LL15T15 16795,9605 r0 top (schematic designator R13)
R13_M12 "ERJ3EKF1002V" RESC1609X55X30LL15T15 17754.41,9815 r0 top (schematic designator R13)
R14_M1 "MCS3264R010FER" FP-MCS3264-MFG 7755,8930 r0 top (schematic designator R14)
R14_M2 "MCS3264R010FER" FP-MCS3264-MFG 8660,8950 r0 top (schematic designator R14)
R14_M3 "MCS3264R010FER" FP-MCS3264-MFG 9550,8930 r0 top (schematic designator R14)
R14_M4 "MCS3264R010FER" FP-MCS3264-MFG 10360,8930 r0 top (schematic designator R14)
R14_M5 "MCS3264R010FER" FP-MCS3264-MFG 11215,8875 r0 top (schematic designator R14)
R14_M6 "MCS3264R010FER" FP-MCS3264-MFG 12097.05,8850 r0 top (schematic designator R14)
R14_M7 "MCS3264R010FER" FP-MCS3264-MFG 11655,18670 r90 top (schematic designator R14)
R14_M8 "MCS3264R010FER" FP-MCS3264-MFG 14255,8880 r0 top (schematic designator R14)
R14_M9 "MCS3264R010FER" FP-MCS3264-MFG 15110,8920 r0 top (schematic designator R14)
R14_M10 "MCS3264R010FER" FP-MCS3264-MFG 16035,8960 r0 top (schematic designator R14)
R14_M11 "MCS3264R010FER" FP-MCS3264-MFG 17012.05,8900 r0 top (schematic designator R14)
R14_M12 "MCS3264R010FER" FP-MCS3264-MFG 17847.95,8940 r0 top (schematic designator R14)
R15_M1 "ERJ3EKF1002V" RESC1609X55X30LL15T15 7765,10425 r0 top (schematic designator R15)
R15_M2 "ERJ3EKF1002V" RESC1609X55X30LL15T15 8460,10370 r0 top (schematic designator R15)
R15_M3 "ERJ3EKF1002V" RESC1609X55X30LL15T15 9395,10130 r0 top (schematic designator R15)
R15_M4 "ERJ3EKF1002V" RESC1609X55X30LL15T15 10215,10435 r0 top (schematic designator R15)
R15_M5 "ERJ3EKF1002V" RESC1609X55X30LL15T15 11350,10175 r0 top (schematic designator R15)
R15_M6 "ERJ3EKF1002V" RESC1609X55X30LL15T15 11805,9770 r0 top (schematic designator R15)
R15_M7 "ERJ3EKF1002V" RESC1609X55X30LL15T15 11200,18815 r90 top (schematic designator R15)
R15_M8 "ERJ3EKF1002V" RESC1609X55X30LL15T15 14290,10090 r0 top (schematic designator R15)
R15_M9 "ERJ3EKF1002V" RESC1609X55X30LL15T15 14855,10385 r0 top (schematic designator R15)
R15_M10 "ERJ3EKF1002V" RESC1609X55X30LL15T15 15789.41,9445 r0 top (schematic designator R15)
R15_M11 "ERJ3EKF1002V" RESC1609X55X30LL15T15 16785,9375 r0 top (schematic designator R15)
R15_M12 "ERJ3EKF1002V" RESC1609X55X30LL15T15 17765,9455 r0 top (schematic designator R15)
U1_M1 "LM324D" D0014A_L 7823.35,6715 r0 top (schematic designator U1)
U1_M2 "LM324D" D0014A_L 8693.35,6735 r0 top (schematic designator U1)
U1_M3 "LM324D" D0014A_L 9563.35,6705 r0 top (schematic designator U1)
U1_M4 "LM324D" D0014A_L 10405,6695 r0 top (schematic designator U1)
U1_M5 "LM324D" D0014A_L 11300,6685 r0 top (schematic designator U1)
U1_M6 "LM324D" D0014A_L 12165,6705 r0 top (schematic designator U1)
U1_M7 "LM324D" D0014A_L 13485,16922.17 r0 top (schematic designator U1)
U1_M8 "LM324D" D0014A_L 14170,6695 r0 top (schematic designator U1)
U1_M9 "LM324D" D0014A_L 15105,6675 r0 top (schematic designator U1)
U1_M10 "LM324D" D0014A_L 16000,6685 r0 top (schematic designator U1)
U1_M11 "LM324D" D0014A_L 16885,6695 r0 top (schematic designator U1)
U1_M12 "LM324D" D0014A_L 17830,6685 r0 top (schematic designator U1)

## Footprints (in the part's own frame and the unit in brackets; to place one, negate y for a bottom-side part, rotate by r counter-clockwise, add the part's x,y. Pads: shape width x height; smd on the part's side, far side on the other; paste and mask are expansions set on the pad)
61302221121 [mm] "Pin Header, pitch 2.54 mm, THT, Vertical, dual row, 22p"
  rect 1.65x1.65 hole 1.1: 1(-12.7,-1.27)
  round 1.65 hole 1.1: 2(-12.7,1.27) 3(-10.16,-1.27) 4(-10.16,1.27) 5(-7.62,-1.27) 6(-7.62,1.27) 7(-5.08,-1.27) 8(-5.08,1.27) 9(-2.54,-1.27) 10(-2.54,1.27) 11(0,-1.27) 12(0,1.27) 13(2.54,-1.27) 14(2.54,1.27) 15(5.08,-1.27) 16(5.08,1.27) 17(7.62,-1.27) 18(7.62,1.27) 19(10.16,-1.27) 20(10.16,1.27) 21(12.7,-1.27) 22(12.7,1.27)
  silkscreen extent -14.12,-2.62 14.12,2.62, body extent -13.97,-2.54 13.97,2.54, height 8.59
D0014A_L [mm] "SOIC, 14-Leads, Body 8.75x4mm, Pitch 1.27mm, IPC High Density"
  rrect18% 1.25x0.55 smd: 1(-2.625,3.81) 2(-2.625,2.54) 3(-2.625,1.27) 4(-2.625,0) 5(-2.625,-1.27) 6(-2.625,-2.54) 7(-2.625,-3.81) 8(2.625,-3.81) 9(2.625,-2.54) 10(2.625,-1.27) 11(2.625,0) 12(2.625,1.27) 13(2.625,2.54) 14(2.625,3.81)
  silkscreen extent -2.75,-4.38 1.6,4.76, body extent -3.02,-4.32 3.02,4.32, height 1.59
FP-43045-0400-MFG [mm]
  rect 1.57x1.57 hole 1.02 paste-1000 mask+0: 1(1.5,3.965)
  round 1.57 hole 1.02 paste-1000 mask+0: 2(-1.5,3.965) 3(1.5,6.965) 4(-1.5,6.965)
  round 3 hole 3 unplated paste-1000 mask+0: ""(0,-0.355)
  silkscreen extent -5.2,-5.21 5.68,4.95, body extent -5.3,-5.31 5.3,7.85, height 0.25
FP-455580003-MFG [mm]
  rect 2.75x2.75 hole 1.8 paste-1000 mask+0: 1(-4.2,-7.5)
  round 2.75 hole 1.8 paste-1000 mask+0: 2(0,-7.5) 3(4.2,-7.5) 4(-4.2,-11.7) 5(0,-11.7) 6(4.2,-11.7)
  round 3 hole 3 unplated paste-1000 mask+0: ""(-4.2,-0.2) ""(4.2,-0.2)
  silkscreen extent -7.81,-7.62 7.09,6.78, body extent -7.19,-13.18 7.19,6.88, height 0.25
FP-CRCW0603-e3-IPC_A [mil]
  rect 44.69x41.82 smd paste+0 mask+0: 1(-32.1,0) 2(32.1,0)
  silkscreen extent -30,-37 30,37, body extent -74,-41 74,41, height 10
FP-ERA3A-IPC_C [mil]
  rect 33.66x35.68 smd paste+0 mask+0: 1(-24.63,0) 2(24.63,0)
  silkscreen extent -41,-35 41,35, body extent -45,-24 45,24, height 10
FP-MCS3264-MFG [mm]
  rect 3.1x3.57 smd paste+0 mask+0: 1(-3.1,0) 2(3.1,0)
  silkscreen extent -1.17,-1.75 1.17,1.75, body extent -4.75,-1.89 4.75,1.89, height 0.25
FP-SMC-MFG [mm]
  rect 2.5x3.3 smd paste+0 mask+0: 1(-3.45,0) 2(3.45,0)
  silkscreen extent -5.57,-3.11 3.55,3.11, body extent -4.8,-3.21 4.8,3.21, height 0.25
FP-SSOP6-P-0_65A-MFG [mm]
  rect 0.8x0.4 smd paste+0 mask+0: 1(-0.95,0.65) 2(-0.95,0) 3(-0.95,-0.65) 4(0.95,-0.65) 5(0.95,0) 6(0.95,0.65)
  silkscreen extent -2.05,-1.1 0.18,1.1, body extent -1.45,-1.2 1.45,1.2, height 0.25
ONSC-DPAK-3-369C-01_V [mm] "DPAK, 3-Leads, Body 6.54x6.095mm, Pitch 2.29mm"
  rect 3x1.6 smd: 1(-4.4,2.29) 3(-4.4,-2.29)
  rect 6.2x5.8 smd: 4(2.8,0)
  silkscreen extent -4.52,-3.27 -0.45,3.76, body extent -1.6,-3.27 4.49,3.27, height 2.38
RESC1608X55X30ML20T20 [mm] "Chip Resistor, 2-Leads, Body 1.60x0.80mm, IPC Low Density"
  rect 1x1.1 smd: 1(-0.7,0) 2(0.7,0)
  body extent -0.9,-0.5 0.9,0.5, height 0.55
RESC1608X55X30NL20T20 [mm] "Chip Resistor, 2-Leads, Body 1.60x0.80mm, IPC Medium Density"
  rect 0.9x1 smd: 1(-0.65,0) 2(0.65,0)
  body extent -0.9,-0.5 0.9,0.5, height 0.55
RESC1609X55X30LL15T15 [mm] "Chip Resistor, 2-Leads, Body 1.75x0.95mm, IPC High Density"
  rect 0.75x0.85 smd: 1(-0.65,0) 2(0.65,0)
  body extent -0.87,-0.48 0.87,0.48, height 0.55

## Part data
D1_M1 D1_M2 D1_M3 D1_M4 D1_M5 D1_M6 D1_M7 D1_M8 D1_M9 D1_M10 D1_M11 D1_M12 D2_M1 D2_M2 D2_M3 D2_M4 D2_M5 D2_M6 D2_M7 D2_M8 D2_M9 D2_M10 D2_M11 D2_M12: library part CMP-2000-07025-2, "DIODE GEN PURP 100V 5A SMC", Capacitance=40pF, Forward Current=5A, Manufacturer="Diodes Inc.", Max Junction Temp=+150°C, Max Repetitive Reverse Voltage=100V, Max Surge Forward Current=100A, Package=SMC, Peak Reverse Current=10uA, Temperature="-65°C to +150°C", Temperature Range Low=-65°C, Automotive=No, Category=Diode, ComponentLink2Description=Datasheet, ComponentLink2URL=https://www.diodes.com/assets/Datasheets/ds16007.pdf, Device Class L1="Discrete Semiconductors", Device Class L2=Diodes, Device Class L3="Rectifier Diodes", Digikey Description="DIODE GEN PURP 100V 5A SMC", Footprint Url=https://www.diodes.com/assets/Package-Files/SMC.pdf, Height=2.5mm, Lead Free=Yes, Manufacturer Part Number=S5BC-13-F, Mouser Description="Rectifiers 100V 5A", Octopart=https://octopart.com/s5bc-13-f-diodes+inc.-333396, Reverse Voltage=100V, RoHS=TRUE, Standoff Height=0.1mm, Temperature Range High=+150°C
J1 J2: library part CMP-04776-000024-1, "CONN HEADER R/A 6POS 4.2MM", Current Rating=8A, Manufacturer=Molex, Package=0, Temperature="-40°C to +105°C", Temperature Range High=+105°C, Temperature Range Low=-40°C, Voltage Rating=600V, Automotive=No, Category=Conn, ComponentLink2Description=Datasheet, ComponentLink2URL=https://www.molex.com/webdocs/datasheets/pdf/en-us/0455580003_PCB_HEADERS.pdf, Conn Gender=Male, Conn Orientation="Right Angle", Contact Material=Tin,Nickel, Device Class L1=Connectors, Device Class L2="Headers and Wire Housings", Device Class L3=unset, Digikey Description="CONN HEADER R/A 6POS 4.2MM", Footprint Url=https://www.molex.com/pdm_docs/sd/455580003_sd.pdf, Height=10.38mm, Lead Free=Yes, Manufacturer Part Number=455580003, Mouser Description="Conn Power HDR 6 POS 4.2mm Solder ST Thru-Hole 6 Terminal 1 Port Mini-Fit Jr™ Tray", Number Of Contacts=6, Number Of Rows=2, Octopart=https://octopart.com/45558-0003-molex-7672845, Pitch=4.2mm, RoHS=TRUE, Standoff Height=0.4mm
J3: library part CMP-04776-000002-1, "CONN HEADER R/A 4POS 3MM", Current Rating=8.5A, Manufacturer=Molex, Temperature="-40°C to +105°C", Temperature Range High=+105°C, Temperature Range Low=-40°C, Voltage Rating=600V, Automotive=No, Category=Conn, ComponentLink2Description=Datasheet, ComponentLink2URL=https://www.molex.com/webdocs/datasheets/pdf/en-us/0430450400_PCB_HEADERS.pdf, Conn Gender=Male, Conn Orientation="Right Angle", Contact Material=Tin,Nickel, Device Class L1=Connectors, Device Class L2="Headers and Wire Housings", Device Class L3=unset, Digikey Description="CONN HEADER R/A 4POS 3MM", Footprint Url=https://www.molex.com/pdm_docs/sd/430450400_sd.pdf, Height=9.27mm, Is Female=yes, Lead Free=Yes, Manufacturer Part Number=43045-0400, Number Of Contacts=4, Number Of Rows=2, Octopart=https://octopart.com/43045-0400-molex-287063, Package=43045-0400, Pitch=3mm, RoHS=TRUE
J4 J5: library part CMP-1502-01108-1, "THT Vertical Pin Header WR-PHD, Pitch 2.54 mm, Dual Row, 22 pins", Contact Resistance=20mOhm, Manufacturer="Wurth Elektronik", Operating Temperature=-40to105degC, Rated Current=3A, Withstanding Voltage=500VAC, Working Voltage=250VAC, Datasheet URL=https://katalog.we-online.de/em/datasheet/6130xx21121.pdf, Gender=Male, Manufacturer URL=http://www.we-online.de, Mounting Technology=THT, Orientation=Vertical, Package Reference=61302221121, Packaging=Bag, Part Number=61302221121, Pin Number=22, Pitch=2.54mm, Publisher=WurthElektronik, Row Number=Dual
Q1_M1 Q1_M2 Q1_M3 Q1_M4 Q1_M5 Q1_M6 Q1_M7 Q1_M8 Q1_M9 Q1_M10 Q1_M11 Q1_M12 Q3_M1 Q3_M2 Q3_M3 Q3_M4 Q3_M5 Q3_M6 Q3_M7 Q3_M8 Q3_M9 Q3_M10 Q3_M11 Q3_M12: library part CMP-1058-00409-1, "Power MOSFET, -25 A, -30 V, Logic Level P-Channel, 3-Pin DPAK, Pb-Free, Tape and Reel", Manufacturer="On Semiconductor", Package Type=DPAK-3, Channel Polarity="P Channel", Ciss Typ (pF)=900, ComponentLink1Description="Manufacturer URL", ComponentLink1URL=http://www.onsemi.com/, ComponentLink2Description=Datasheet, ComponentLink2URL=http://www.onsemi.cn/pub_link/Collateral/NTD25P03L-D.PDF, ComponentLink3Description="Package Specification", ComponentLink3URL=http://www.onsemi.cn/pub_link/Collateral/369C.PDF, Configuration=Single, Coss Typ (pF)=290, Crss Typ (pF)=105, DatasheetVersion="Rev. 4", ID Max (A)=25, Mounting Technology="Surface Mount", PackageDescription="3-Pin Flange Mount, Body 6.54 x 6.095 mm, Pitch 2.29 mm", PackageReference=DPAK-3-369C-01, PackageVersion="Rev. E, 02/2014", Packing="Tape and Reel", PartNumber=NTD25P03LT4G, PD Max (W)=75, Qrr Typ (nC)=35, RoHS=Pb-Free, V(BR)DSS Min (V)=30, VGS Max (V)=15, VGS(th) Max (V)=2
Q2_M1 Q2_M2 Q2_M3 Q2_M4 Q2_M5 Q2_M6 Q2_M7 Q2_M8 Q2_M9 Q2_M10 Q2_M11 Q2_M12: library part CMP-35916-000009-1, "MOSFET 2N-CH 60V 0.3A", Continuous Drain Current (ID)=300mA, Drain to Source Voltage (Vdss)=60V, Input Capacitance=40pF, Max Power Dissipation=285mW, FET Type="2 N-Channel", Mount="Surface Mount", Packaging="Tape and Reel", Rds On Max=1.5R
R1_M1 R1_M2 R1_M3 R1_M4 R1_M5 R1_M6 R1_M7 R1_M8 R1_M9 R1_M10 R1_M11 R1_M12 R9_M1 R9_M2 R9_M3 R9_M4 R9_M5 R9_M6 R9_M7 R9_M8 R9_M9 R9_M10 R9_M11 R9_M12: library part CMP-2000-03352-2, "RES Thick Film, 43kΩ, 1%, 0.1W, 100ppm/°C, 0603", Case Code (Imperial)=0603, Case Code (Metric)=1608, Max Operating Temperature=155°C, Max Power Dissipation=100mW, Min Operating Temperature=-55°C, Package Quantity=10, Resistance=43kR, Temperature Coefficient=100ppm/°C, Tolerance=1%, Voltage Rating=75V, Case/Package=0603, Composition="Thick Film", Contact Plating=Tin, Depth=0.85mm, Features="Automotive AEC-Q200", Height=0.45mm, Lead Free="Lead Free", Length=1.55mm, Military Standard=Not, Mount="Surface Mount", Number of Pins=2, Number of Terminations=2, Packaging="Tape and Reel", Power Rating=100mW, Radiation Hardening=No, Termination=SMD/SMT, Voltage Rating (DC)=75V, Weight=7.1E-05oz, Width=0.033inch
R2_M1 R2_M2 R2_M3 R2_M4 R2_M5 R2_M6 R2_M7 R2_M8 R2_M9 R2_M10 R2_M11 R2_M12 R5_M1 R5_M2 R5_M3 R5_M4 R5_M5 R5_M6 R5_M7 R5_M8 R5_M9 R5_M10 R5_M11 R5_M12: library part CMP-2000-00873-2, "RES SMD 1K OHM 0.1% 1/10W 0603", Case Code (Imperial)=0603, Case Code (Metric)=1608, Max Operating Temperature=155°C, Max Power Dissipation=100mW, Min Operating Temperature=-55°C, Package Quantity=5000, Resistance=1kR, Resistance Tolerance=0.1%, Resistor Type="Thin Film", Temperature Coefficient=25ppm/°C, Voltage Rating=75V, Case/Package=0603, Construction=Rectangular, Contact Plating=Tin, Depth=0.8mm, Height=0.45mm, Length=1.6mm, Military Standard=Not, Mount="Surface Mount", Number of Pins=2, Number of Terminations=2, Packaging="Tape and Reel", Power Rating=100mW, Radiation Hardening=No, REACH SVHC="No SVHC", RoHS Compliant=Yes, Series=ERA-3A, Size Code=0603, Technology="METAL FILM", Termination=SMD/SMT, Tolerance=0.1%, Width=0.8mm
R3_M1 R3_M2 R3_M3 R3_M4 R3_M5 R3_M6 R3_M7 R3_M8 R3_M9 R3_M10 R3_M11 R3_M12 R4_M1 R4_M2 R4_M3 R4_M4 R4_M5 R4_M6 R4_M7 R4_M8 R4_M9 R4_M10 R4_M11 R4_M12 R6_M1 R6_M2 R6_M3 R6_M4 R6_M5 R6_M6 R6_M7 R6_M8 R6_M9 R6_M10 R6_M11 R6_M12 R7_M1 R7_M2 R7_M3 R7_M4 R7_M5 R7_M6 R7_M7 R7_M8 R7_M9 R7_M10 R7_M11 R7_M12 R10_M1 R10_M2 R10_M3 R10_M4 R10_M5 R10_M6 R10_M7 R10_M8 R10_M9 R10_M10 R10_M11 R10_M12 R11_M1 R11_M2 R11_M3 R11_M4 R11_M5 R11_M6 R11_M7 R11_M8 R11_M9 R11_M10 R11_M11 R11_M12 R13_M1 R13_M2 R13_M3 R13_M4 R13_M5 R13_M6 R13_M7 R13_M8 R13_M9 R13_M10 R13_M11 R13_M12 R15_M1 R15_M2 R15_M3 R15_M4 R15_M5 R15_M6 R15_M7 R15_M8 R15_M9 R15_M10 R15_M11 R15_M12: library part CMP-1012-00623-3, "Chip Resistor, 10 KOhm, +/- 1%, 0.1 W, -55 to 155 degC, 0603 (1608 Metric), RoHS, Tape and Reel", Case Code (Imperial)=0603, Case Code (Metric)=1608, Manufacturer=Panasonic, Max Operating Temperature=155degC, Max Power Dissipation=100mW, Min Operating Temperature=-55degC, Package Description="2-Pin Surface Mount Device, Body 1.6 x 0.85 mm", Package Quantity=1, Package Reference=603, Resistance=10KOhm, Temperature Coefficient=100ppm\/degreesC, Tolerance=1%, Voltage Rating=75V, Case\/Package=0603, Composition=ThickFilm, Contact Plating=Tin, Datasheet URL=https://industrial.panasonic.com/cdbs/www-data/pdf/RDA0000/AOA0000C304.pdf, Datasheet Version=02/2017, Depth=0.8mm, Height=0.45mm, Lead Free=LeadFree, Length=1.6mm, Manufacturer URL=http://www.panasonic.com/, Military Standard=Not, Mount=SurfaceMount, Mounting Technology=SurfaceMount, Number of Pins=2, Number of Terminations=2, Packaging=TapeandReel, Power Rating=100mW, Radiation Hardening=No, REACH SVHC=NoSVHC, RoHSCompliant=true, Termination=SMD/SMT, Voltage Rating (DC)=75V, Width=0.031inch
R8_M1 R8_M2 R8_M3 R8_M4 R8_M5 R8_M6 R8_M7 R8_M8 R8_M9 R8_M10 R8_M11 R8_M12: library part CMP-2000-00122-1, Manufacturer=Panasonic, Part Number=ERA-3AEB751V
R12_M1 R12_M2 R12_M3 R12_M4 R12_M5 R12_M6 R12_M7 R12_M8 R12_M9 R12_M10 R12_M11 R12_M12: library part CMP-2000-00965-1, Manufacturer=Panasonic, Part Number=ERA3AEB242V
R14_M1 R14_M2 R14_M3 R14_M4 R14_M5 R14_M6 R14_M7 R14_M8 R14_M9 R14_M10 R14_M11 R14_M12: library part CMP-33361-000012-1, "RES SMD 10 MOHM 1% 2W 3264", Case Code (Imperial)=2512, Case Code (Metric)=6432, Max Operating Temperature=150°C, Max Power Dissipation=2W, Min Operating Temperature=-55°C, Package Quantity=1, Resistance=10mR, Temperature Coefficient=50ppm/°C, Tolerance=1%, Voltage Rating=220mV, Case/Package=2512, Composition="Metal Element", Depth=3.2mm, Features="Flame Retardant Coating", Height=0.024inch, Length=6.4mm, Military Standard=Not, Mount="Surface Mount", Number of Pins=2, Number of Terminations=2, Packaging="Tape and Reel", Power Rating=2W, Termination=SMD/SMT, Width=0.126inch
U1_M1 U1_M2 U1_M3 U1_M4 U1_M5 U1_M6 U1_M7 U1_M8 U1_M9 U1_M10 U1_M11 U1_M12: library part CMP-2000-06547-1, "Quadruple Operational Amplifier, 0.5 V/us, 1.2 MHz, 3 to 32 V, 0 to 70 degC, 14-Pin SOIC (D), Green (RoHS & no Sb/Br), Tube", Dual Supply Voltage (Max)=±16V, Dual Supply Voltage (Min)=±1.5V, Dual Supply Voltage (Typ)=±3/±5/±9/±12/±15V, Input Bias Current=250nA, Input Offset Voltage=7mV, Manufacturer="Texas Instruments", Operating Temp Range=0Cto70C, Operating Temperature Classification=Commercial, Package Description="14-Pin Small Outline Integrated Circuit, Body 8.65 x 3.9 mm, Pitch 1.27 mm", Package Reference=D0014A, Package Type=SOIC, Power Supply Requirement=Single/Dual, Single Supply Voltage (Max)=32V, Single Supply Voltage (Min)=3V, Single Supply Voltage (Typ)=5/9/12/15/18/24/28V, Voltage Gain in dB=100dB, Common Mode Rejection Ratio=65dB, Datasheet URL=http://www.ti.com/lit/ds/symlink/lm324.pdf, Datasheet Version="Rev. W, 03/2015", Manufacturer URL=http://www.ti.com/, Mounting=SurfaceMount, Mounting Technology=SurfaceMount, Number of  Elements=4, Package URL=http://www.ti.com/lit/ml/mpds177g/mpds177g.pdf, Packaging=Rail/Tube, Pin Count=14, Rail/Rail I/O Type=No, Shut Down Feature=No, Slew Rate=0.5V/us, Technology=Bipolar, Type=GeneralPurposeAmplifier, Unity Gain Bandwidth Product=1.2MHz

## Nets (pads, with @x,y where several pads share a name; then routed paths per layer and width w, separated by ;. In a path a pad name is that pad's centre, name@x,y a point inside that pad or via, vN(x,y) a via of type N, cw(c..) or ccw(c..) an arc to the next point about the centre after c; other vN are vias at no path point)
CUR_SENSE_1: R1_M7.2 U1_M7.14
CUR_SENSE_2: R1_M8.2 U1_M8.14
CUR_SENSE_3: R1_M9.2 U1_M9.14
CUR_SENSE_4: R1_M10.2 U1_M10.14
CUR_SENSE_5: R1_M11.2 U1_M11.14
CUR_SENSE_6: R1_M12.2 U1_M12.14
CUR_SENSE_7: R1_M1.2 U1_M1.14
CUR_SENSE_8: R1_M2.2 U1_M2.14
CUR_SENSE_9: R1_M3.2 U1_M3.14
CUR_SENSE_10: R1_M4.2 U1_M4.14
CUR_SENSE_11: R1_M5.2 U1_M5.14
CUR_SENSE_12: R1_M6.2 U1_M6.14
DIV_1_M1: R3_M1.1 R8_M1.2 U1_M1.3
DIV_1_M2: R3_M2.1 R8_M2.2 U1_M2.3
DIV_1_M3: R3_M3.1 R8_M3.2 U1_M3.3
DIV_1_M4: R3_M4.1 R8_M4.2 U1_M4.3
DIV_1_M5: R3_M5.1 R8_M5.2 U1_M5.3
DIV_1_M6: R3_M6.1 R8_M6.2 U1_M6.3
DIV_1_M7: R3_M7.1 R8_M7.2 U1_M7.3
DIV_1_M8: R3_M8.1 R8_M8.2 U1_M8.3
DIV_1_M9: R3_M9.1 R8_M9.2 U1_M9.3
DIV_1_M10: R3_M10.1 R8_M10.2 U1_M10.3
DIV_1_M11: R3_M11.1 R8_M11.2 U1_M11.3
DIV_1_M12: R3_M12.1 R8_M12.2 U1_M12.3
GND: J3.3 J3.4 Q2_M1.1 Q2_M1.4 Q2_M2.1 Q2_M2.4 Q2_M3.1 Q2_M3.4 Q2_M4.1 Q2_M4.4 Q2_M5.1 Q2_M5.4 Q2_M6.1 Q2_M6.4 Q2_M7.1 Q2_M7.4 Q2_M8.1 Q2_M8.4 Q2_M9.1 Q2_M9.4 Q2_M10.1 Q2_M10.4 Q2_M11.1 Q2_M11.4 Q2_M12.1 Q2_M12.4 R4_M1.1 R4_M2.1 R4_M3.1 R4_M4.1 R4_M5.1 R4_M6.1 R4_M7.1 R4_M8.1 R4_M9.1 R4_M10.1 R4_M11.1 R4_M12.1 R8_M1.1 R8_M2.1 R8_M3.1 R8_M4.1 R8_M5.1 R8_M6.1 R8_M7.1 R8_M8.1 R8_M9.1 R8_M10.1 R8_M11.1 R8_M12.1 R9_M1.1 R9_M2.1 R9_M3.1 R9_M4.1 R9_M5.1 R9_M6.1 R9_M7.1 R9_M8.1 R9_M9.1 R9_M10.1 R9_M11.1 R9_M12.1 R12_M1.1 R12_M2.1 R12_M3.1 R12_M4.1 R12_M5.1 R12_M6.1 R12_M7.1 R12_M8.1 R12_M9.1 R12_M10.1 R12_M11.1 R12_M12.1 R15_M1.2 R15_M2.2 R15_M3.2 R15_M4.2 R15_M5.2 R15_M6.2 R15_M7.2 R15_M8.2 R15_M9.2 R15_M10.2 R15_M11.2 R15_M12.2 U1_M1.11 U1_M2.11 U1_M3.11 U1_M4.11 U1_M5.11 U1_M6.11 U1_M7.11 U1_M8.11 U1_M9.11 U1_M10.11 U1_M11.11 U1_M12.11
NetQ1_M1_1: Q1_M1.1 Q2_M1.6 R13_M1.1
NetQ1_M2_1: Q1_M2.1 Q2_M2.6 R13_M2.1
NetQ1_M3_1: Q1_M3.1 Q2_M3.6 R13_M3.1
NetQ1_M4_1: Q1_M4.1 Q2_M4.6 R13_M4.1
NetQ1_M5_1: Q1_M5.1 Q2_M5.6 R13_M5.1
NetQ1_M6_1: Q1_M6.1 Q2_M6.6 R13_M6.1
NetQ1_M7_1: Q1_M7.1 Q2_M7.6 R13_M7.1
NetQ1_M8_1: Q1_M8.1 Q2_M8.6 R13_M8.1
NetQ1_M9_1: Q1_M9.1 Q2_M9.6 R13_M9.1
NetQ1_M10_1: Q1_M10.1 Q2_M10.6 R13_M10.1
NetQ1_M11_1: Q1_M11.1 Q2_M11.6 R13_M11.1
NetQ1_M12_1: Q1_M12.1 Q2_M12.6 R13_M12.1
NetQ2_M1_3: Q2_M1.3 Q3_M1.1
NetQ2_M2_3: Q2_M2.3 Q3_M2.1
NetQ2_M3_3: Q2_M3.3 Q3_M3.1
NetQ2_M4_3: Q2_M4.3 Q3_M4.1
NetQ2_M5_3: Q2_M5.3 Q3_M5.1
NetQ2_M6_3: Q2_M6.3 Q3_M6.1
NetQ2_M7_3: Q2_M7.3 Q3_M7.1
NetQ2_M8_3: Q2_M8.3 Q3_M8.1
NetQ2_M9_3: Q2_M9.3 Q3_M9.1
NetQ2_M10_3: Q2_M10.3 Q3_M10.1
NetQ2_M11_3: Q2_M11.3 Q3_M11.1
NetQ2_M12_3: Q2_M12.3 Q3_M12.1
NetR1_M1_1: R1_M1.1 R2_M1.2 U1_M1.13
NetR1_M2_1: R1_M2.1 R2_M2.2 U1_M2.13
NetR1_M3_1: R1_M3.1 R2_M3.2 U1_M3.13
NetR1_M4_1: R1_M4.1 R2_M4.2 U1_M4.13
NetR1_M5_1: R1_M5.1 R2_M5.2 U1_M5.13
NetR1_M6_1: R1_M6.1 R2_M6.2 U1_M6.13
NetR1_M7_1: R1_M7.1 R2_M7.2 U1_M7.13
NetR1_M8_1: R1_M8.1 R2_M8.2 U1_M8.13
NetR1_M9_1: R1_M9.1 R2_M9.2 U1_M9.13
NetR1_M10_1: R1_M10.1 R2_M10.2 U1_M10.13
NetR1_M11_1: R1_M11.1 R2_M11.2 U1_M11.13
NetR1_M12_1: R1_M12.1 R2_M12.2 U1_M12.13
NetR4_M1_2: R4_M1.2 R7_M1.2 U1_M1.9
NetR4_M2_2: R4_M2.2 R7_M2.2 U1_M2.9
NetR4_M3_2: R4_M3.2 R7_M3.2 U1_M3.9
NetR4_M4_2: R4_M4.2 R7_M4.2 U1_M4.9
NetR4_M5_2: R4_M5.2 R7_M5.2 U1_M5.9
NetR4_M6_2: R4_M6.2 R7_M6.2 U1_M6.9
NetR4_M7_2: R4_M7.2 R7_M7.2 U1_M7.9
NetR4_M8_2: R4_M8.2 R7_M8.2 U1_M8.9
NetR4_M9_2: R4_M9.2 R7_M9.2 U1_M9.9
NetR4_M10_2: R4_M10.2 R7_M10.2 U1_M10.9
NetR4_M11_2: R4_M11.2 R7_M11.2 U1_M11.9
NetR4_M12_2: R4_M12.2 R7_M12.2 U1_M12.9
NetR5_M1_2: R5_M1.2 R9_M1.2 U1_M1.12
NetR5_M2_2: R5_M2.2 R9_M2.2 U1_M2.12
NetR5_M3_2: R5_M3.2 R9_M3.2 U1_M3.12
NetR5_M4_2: R5_M4.2 R9_M4.2 U1_M4.12
NetR5_M5_2: R5_M5.2 R9_M5.2 U1_M5.12
NetR5_M6_2: R5_M6.2 R9_M6.2 U1_M6.12
NetR5_M7_2: R5_M7.2 R9_M7.2 U1_M7.12
NetR5_M8_2: R5_M8.2 R9_M8.2 U1_M8.12
NetR5_M9_2: R5_M9.2 R9_M9.2 U1_M9.12
NetR5_M10_2: R5_M10.2 R9_M10.2 U1_M10.12
NetR5_M11_2: R5_M11.2 R9_M11.2 U1_M11.12
NetR5_M12_2: R5_M12.2 R9_M12.2 U1_M12.12
NetR6_M1_1: R6_M1.1 R11_M1.1 U1_M1.10
NetR6_M1_2: R6_M1.2 U1_M1.1 U1_M1.2
NetR6_M2_1: R6_M2.1 R11_M2.1 U1_M2.10
NetR6_M2_2: R6_M2.2 U1_M2.1 U1_M2.2
NetR6_M3_1: R6_M3.1 R11_M3.1 U1_M3.10
NetR6_M3_2: R6_M3.2 U1_M3.1 U1_M3.2
NetR6_M4_1: R6_M4.1 R11_M4.1 U1_M4.10
NetR6_M4_2: R6_M4.2 U1_M4.1 U1_M4.2
NetR6_M5_1: R6_M5.1 R11_M5.1 U1_M5.10
NetR6_M5_2: R6_M5.2 U1_M5.1 U1_M5.2
NetR6_M6_1: R6_M6.1 R11_M6.1 U1_M6.10
NetR6_M6_2: R6_M6.2 U1_M6.1 U1_M6.2
NetR6_M7_1: R6_M7.1 R11_M7.1 U1_M7.10
NetR6_M7_2: R6_M7.2 U1_M7.1 U1_M7.2
NetR6_M8_1: R6_M8.1 R11_M8.1 U1_M8.10
NetR6_M8_2: R6_M8.2 U1_M8.1 U1_M8.2
NetR6_M9_1: R6_M9.1 R11_M9.1 U1_M9.10
NetR6_M9_2: R6_M9.2 U1_M9.1 U1_M9.2
NetR6_M10_1: R6_M10.1 R11_M10.1 U1_M10.10
NetR6_M10_2: R6_M10.2 U1_M10.1 U1_M10.2
NetR6_M11_1: R6_M11.1 R11_M11.1 U1_M11.10
NetR6_M11_2: R6_M11.2 U1_M11.1 U1_M11.2
NetR6_M12_1: R6_M12.1 R11_M12.1 U1_M12.10
NetR6_M12_2: R6_M12.2 U1_M12.1 U1_M12.2
NetR10_M1_1: R10_M1.1 R12_M1.2 U1_M1.5
NetR10_M2_1: R10_M2.1 R12_M2.2 U1_M2.5
NetR10_M3_1: R10_M3.1 R12_M3.2 U1_M3.5
NetR10_M4_1: R10_M4.1 R12_M4.2 U1_M4.5
NetR10_M5_1: R10_M5.1 R12_M5.2 U1_M5.5
NetR10_M6_1: R10_M6.1 R12_M6.2 U1_M6.5
NetR10_M7_1: R10_M7.1 R12_M7.2 U1_M7.5
NetR10_M8_1: R10_M8.1 R12_M8.2 U1_M8.5
NetR10_M9_1: R10_M9.1 R12_M9.2 U1_M9.5
NetR10_M10_1: R10_M10.1 R12_M10.2 U1_M10.5
NetR10_M11_1: R10_M11.1 R12_M11.2 U1_M11.5
NetR10_M12_1: R10_M12.1 R12_M12.2 U1_M12.5
NetR11_M1_2: R11_M1.2 U1_M1.6 U1_M1.7
NetR11_M2_2: R11_M2.2 U1_M2.6 U1_M2.7
NetR11_M3_2: R11_M3.2 U1_M3.6 U1_M3.7
NetR11_M4_2: R11_M4.2 U1_M4.6 U1_M4.7
NetR11_M5_2: R11_M5.2 U1_M5.6 U1_M5.7
NetR11_M6_2: R11_M6.2 U1_M6.6 U1_M6.7
NetR11_M7_2: R11_M7.2 U1_M7.6 U1_M7.7
NetR11_M8_2: R11_M8.2 U1_M8.6 U1_M8.7
NetR11_M9_2: R11_M9.2 U1_M9.6 U1_M9.7
NetR11_M10_2: R11_M10.2 U1_M10.6 U1_M10.7
NetR11_M11_2: R11_M11.2 U1_M11.6 U1_M11.7
NetR11_M12_2: R11_M12.2 U1_M12.6 U1_M12.7
OUT_1: J1.1 R2_M7.1 R14_M7.2
OUT_2: J1.2 R2_M8.1 R14_M8.2
OUT_3: J1.3 R2_M9.1 R14_M9.2
OUT_4: J1.4 R2_M10.1 R14_M10.2
OUT_5: J1.5 R2_M11.1 R14_M11.2
OUT_6: J1.6 R2_M12.1 R14_M12.2
OUT_7: J2.1 R2_M1.1 R14_M1.2
OUT_8: J2.2 R2_M2.1 R14_M2.2
OUT_9: J2.3 R2_M3.1 R14_M3.2
OUT_10: J2.4 R2_M4.1 R14_M4.2
OUT_11: J2.5 R2_M5.1 R14_M5.2
OUT_12: J2.6 R2_M6.1 R14_M6.2
SENSE_1: R7_M7.1 U1_M7.8
SENSE_1_M1: D1_M1.2 Q1_M1.4 R3_M1.2
SENSE_1_M2: D1_M2.2 Q1_M2.4 R3_M2.2
SENSE_1_M3: D1_M3.2 Q1_M3.4 R3_M3.2
SENSE_1_M4: D1_M4.2 Q1_M4.4 R3_M4.2
SENSE_1_M5: D1_M5.2 Q1_M5.4 R3_M5.2
SENSE_1_M6: D1_M6.2 Q1_M6.4 R3_M6.2
SENSE_1_M7: D1_M7.2 Q1_M7.4 R3_M7.2
SENSE_1_M8: D1_M8.2 Q1_M8.4 R3_M8.2
SENSE_1_M9: D1_M9.2 Q1_M9.4 R3_M9.2
SENSE_1_M10: D1_M10.2 Q1_M10.4 R3_M10.2
SENSE_1_M11: D1_M11.2 Q1_M11.4 R3_M11.2
SENSE_1_M12: D1_M12.2 Q1_M12.4 R3_M12.2
SENSE_2: R7_M8.1 U1_M8.8
SENSE_2_M1: D2_M1.2 Q3_M1.4 R10_M1.2
SENSE_2_M2: D2_M2.2 Q3_M2.4 R10_M2.2
SENSE_2_M3: D2_M3.2 Q3_M3.4 R10_M3.2
SENSE_2_M4: D2_M4.2 Q3_M4.4 R10_M4.2
SENSE_2_M5: D2_M5.2 Q3_M5.4 R10_M5.2
SENSE_2_M6: D2_M6.2 Q3_M6.4 R10_M6.2
SENSE_2_M7: D2_M7.2 Q3_M7.4 R10_M7.2
SENSE_2_M8: D2_M8.2 Q3_M8.4 R10_M8.2
SENSE_2_M9: D2_M9.2 Q3_M9.4 R10_M9.2
SENSE_2_M10: D2_M10.2 Q3_M10.4 R10_M10.2
SENSE_2_M11: D2_M11.2 Q3_M11.4 R10_M11.2
SENSE_2_M12: D2_M12.2 Q3_M12.4 R10_M12.2
SENSE_3: R7_M9.1 U1_M9.8
SENSE_4: R7_M10.1 U1_M10.8
SENSE_5: R7_M11.1 U1_M11.8
SENSE_6: R7_M12.1 U1_M12.8
SENSE_7: R7_M1.1 U1_M1.8
SENSE_8: R7_M2.1 U1_M2.8
SENSE_9: R7_M3.1 U1_M3.8
SENSE_10: R7_M4.1 U1_M4.8
SENSE_11: R7_M5.1 U1_M5.8
SENSE_12: R7_M6.1 U1_M6.8
SHUNT+_M1: D1_M1.1 D2_M1.1 R5_M1.1 R14_M1.1
SHUNT+_M2: D1_M2.1 D2_M2.1 R5_M2.1 R14_M2.1
SHUNT+_M3: D1_M3.1 D2_M3.1 R5_M3.1 R14_M3.1
SHUNT+_M4: D1_M4.1 D2_M4.1 R5_M4.1 R14_M4.1
SHUNT+_M5: D1_M5.1 D2_M5.1 R5_M5.1 R14_M5.1
SHUNT+_M6: D1_M6.1 D2_M6.1 R5_M6.1 R14_M6.1
SHUNT+_M7: D1_M7.1 D2_M7.1 R5_M7.1 R14_M7.1
SHUNT+_M8: D1_M8.1 D2_M8.1 R5_M8.1 R14_M8.1
SHUNT+_M9: D1_M9.1 D2_M9.1 R5_M9.1 R14_M9.1
SHUNT+_M10: D1_M10.1 D2_M10.1 R5_M10.1 R14_M10.1
SHUNT+_M11: D1_M11.1 D2_M11.1 R5_M11.1 R14_M11.1
SHUNT+_M12: D1_M12.1 D2_M12.1 R5_M12.1 R14_M12.1
TRIG_1: Q2_M7.2 Q2_M7.5 R15_M7.1
TRIG_2: Q2_M8.2 Q2_M8.5 R15_M8.1
TRIG_3: Q2_M9.2 Q2_M9.5 R15_M9.1
TRIG_4: Q2_M10.2 Q2_M10.5 R15_M10.1
TRIG_5: Q2_M11.2 Q2_M11.5 R15_M11.1
TRIG_6: Q2_M12.2 Q2_M12.5 R15_M12.1
TRIG_7: Q2_M1.2 Q2_M1.5 R15_M1.1
TRIG_8: Q2_M2.2 Q2_M2.5 R15_M2.1
TRIG_9: Q2_M3.2 Q2_M3.5 R15_M3.1
TRIG_10: Q2_M4.2 Q2_M4.5 R15_M4.1
TRIG_11: Q2_M5.2 Q2_M5.5 R15_M5.1
TRIG_12: Q2_M6.2 Q2_M6.5 R15_M6.1
VCC: J3.1 J3.2 Q1_M1.3 Q1_M2.3 Q1_M3.3 Q1_M4.3 Q1_M5.3 Q1_M6.3 Q1_M7.3 Q1_M8.3 Q1_M9.3 Q1_M10.3 Q1_M11.3 Q1_M12.3 Q3_M1.3 Q3_M2.3 Q3_M3.3 Q3_M4.3 Q3_M5.3 Q3_M6.3 Q3_M7.3 Q3_M8.3 Q3_M9.3 Q3_M10.3 Q3_M11.3 Q3_M12.3 R13_M1.2 R13_M2.2 R13_M3.2 R13_M4.2 R13_M5.2 R13_M6.2 R13_M7.2 R13_M8.2 R13_M9.2 R13_M10.2 R13_M11.2 R13_M12.2 U1_M1.4 U1_M2.4 U1_M3.4 U1_M4.4 U1_M5.4 U1_M6.4 U1_M7.4 U1_M8.4 U1_M9.4 U1_M10.4 U1_M11.4 U1_M12.4
pads on no net: J1. J2. J3. J4.1 J4.2 J4.3 J4.4 J4.5 J4.6 J4.7 J4.8 J4.9 J4.10 J4.11 J4.12 J4.13 J4.14 J4.15 J4.16 J4.17 J4.18 J4.19 J4.20 J4.21 J4.22 J5.1 J5.2 J5.3 J5.4 J5.5 J5.6 J5.7 J5.8 J5.9 J5.10 J5.11 J5.12 J5.13 J5.14 J5.15 J5.16 J5.17 J5.18 J5.19 J5.20 J5.21 J5.22

## Text inside footprints (layer, text, board x,y; h text height)
J4: Top Overlay "22" at 8974.57,3718.11 h40 r90; Top Overlay "21" at 9080.87,3718.11 h40 r90; Top Overlay "2" at 8974.57,2554.33 h40 r90; Top Overlay "1" at 9080.87,2566.14 h40 r90
J5: Top Overlay "22" at 9974.57,3458.11 h40 r90; Top Overlay "21" at 10080.87,3458.11 h40 r90; Top Overlay "2" at 9974.57,2294.33 h40 r90; Top Overlay "1" at 10080.87,2306.14 h40 r90